# EAGLE board Qwiic_PIR-Panel (EAGLE 9.6.0), part 1 of 5
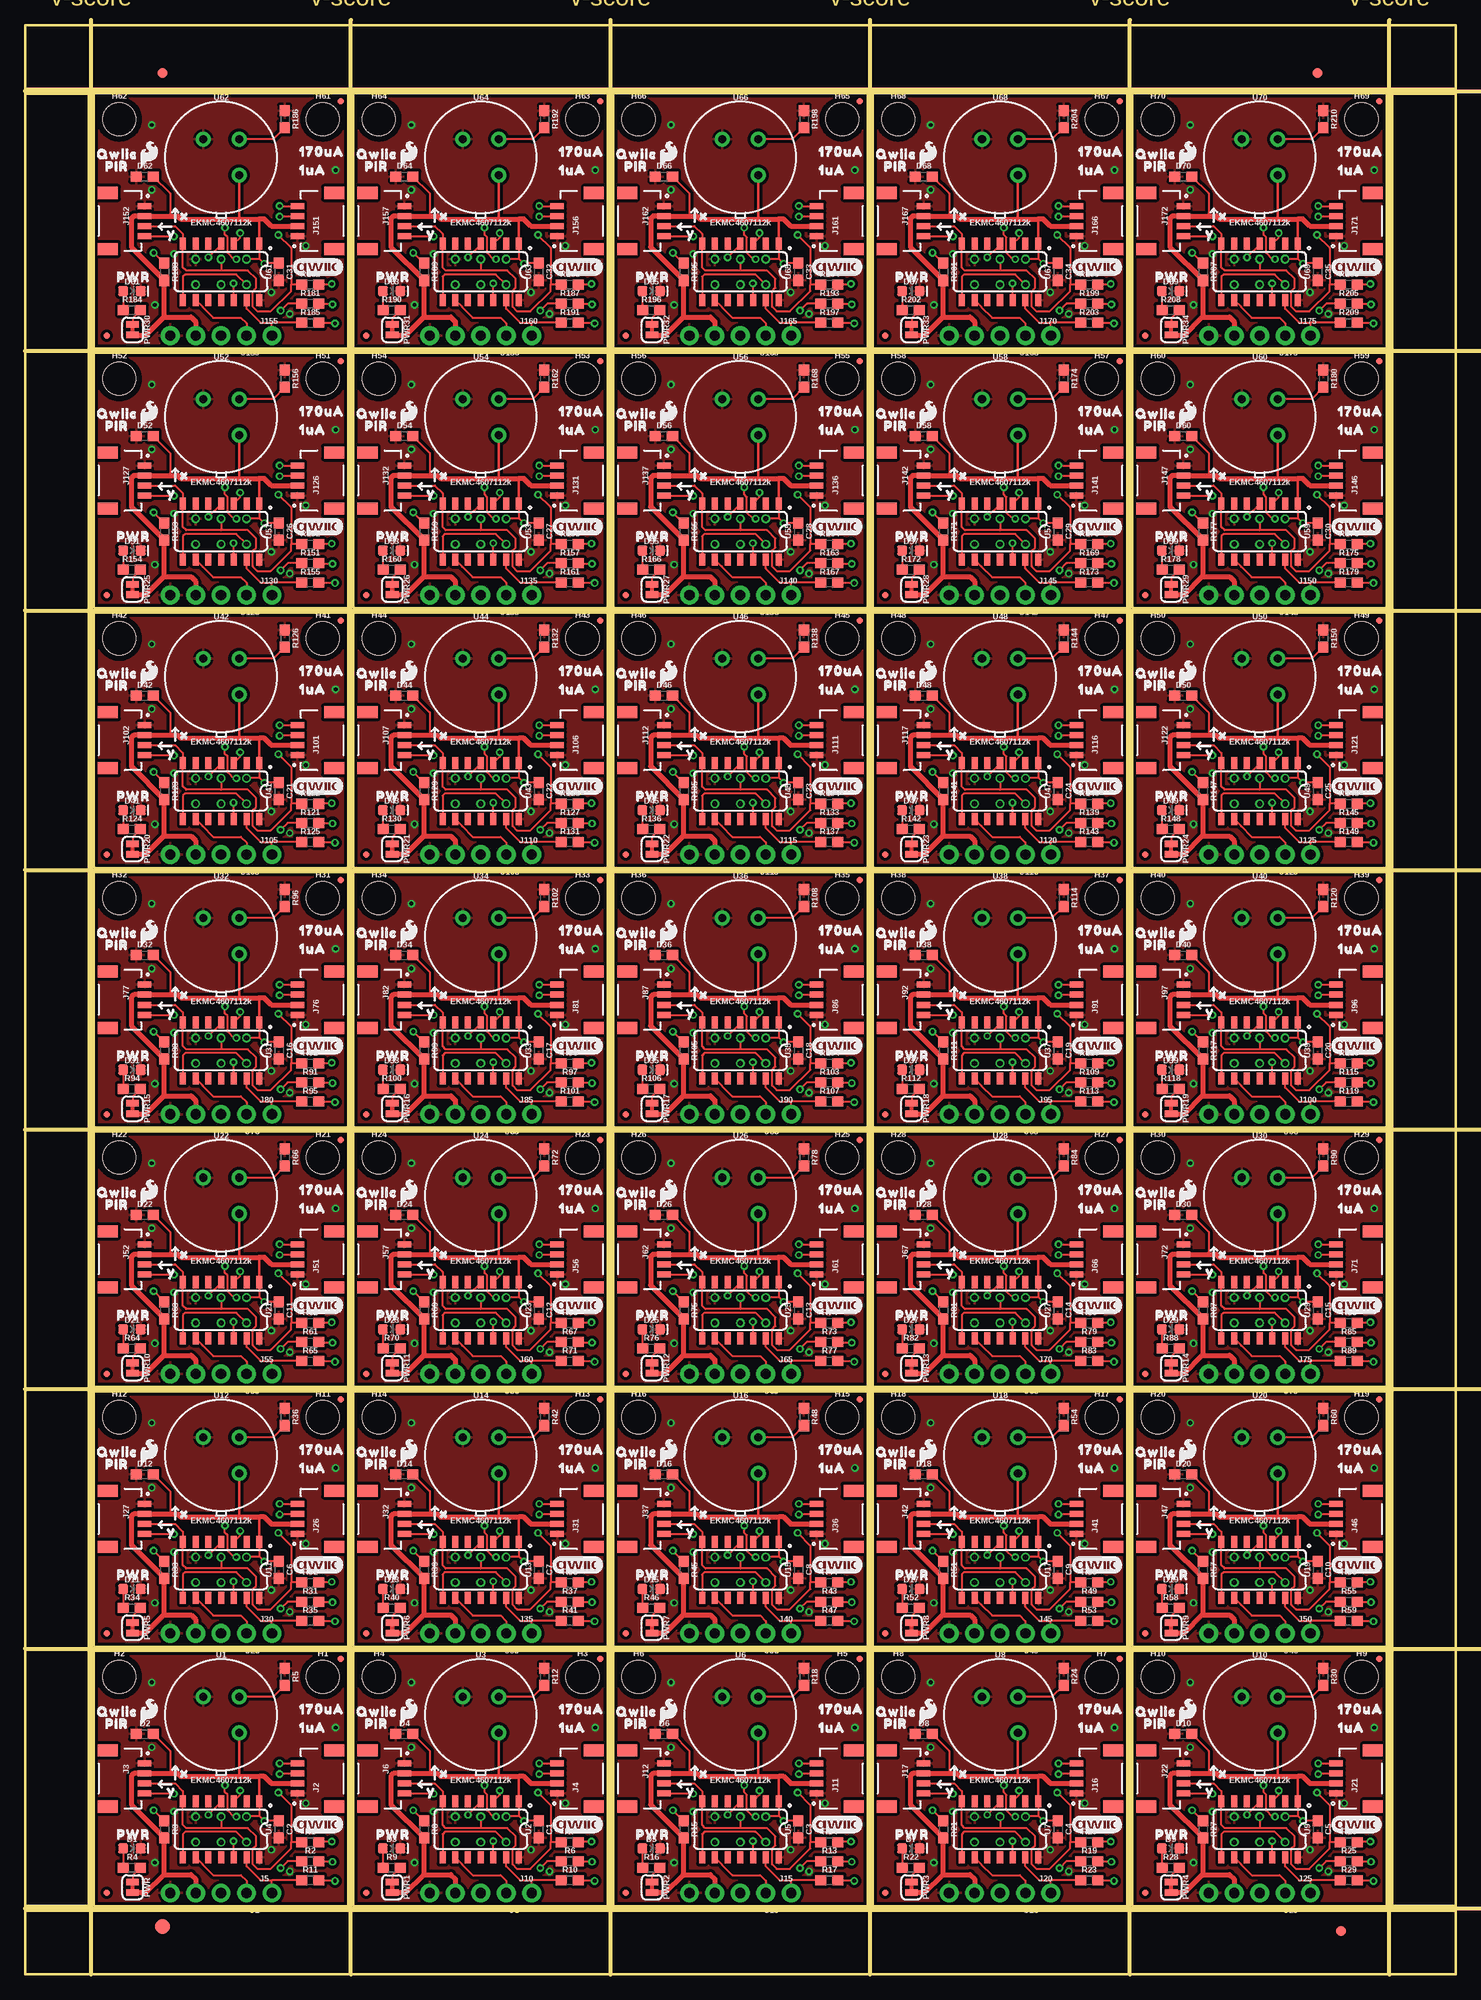
[diagram p0: board, top side]
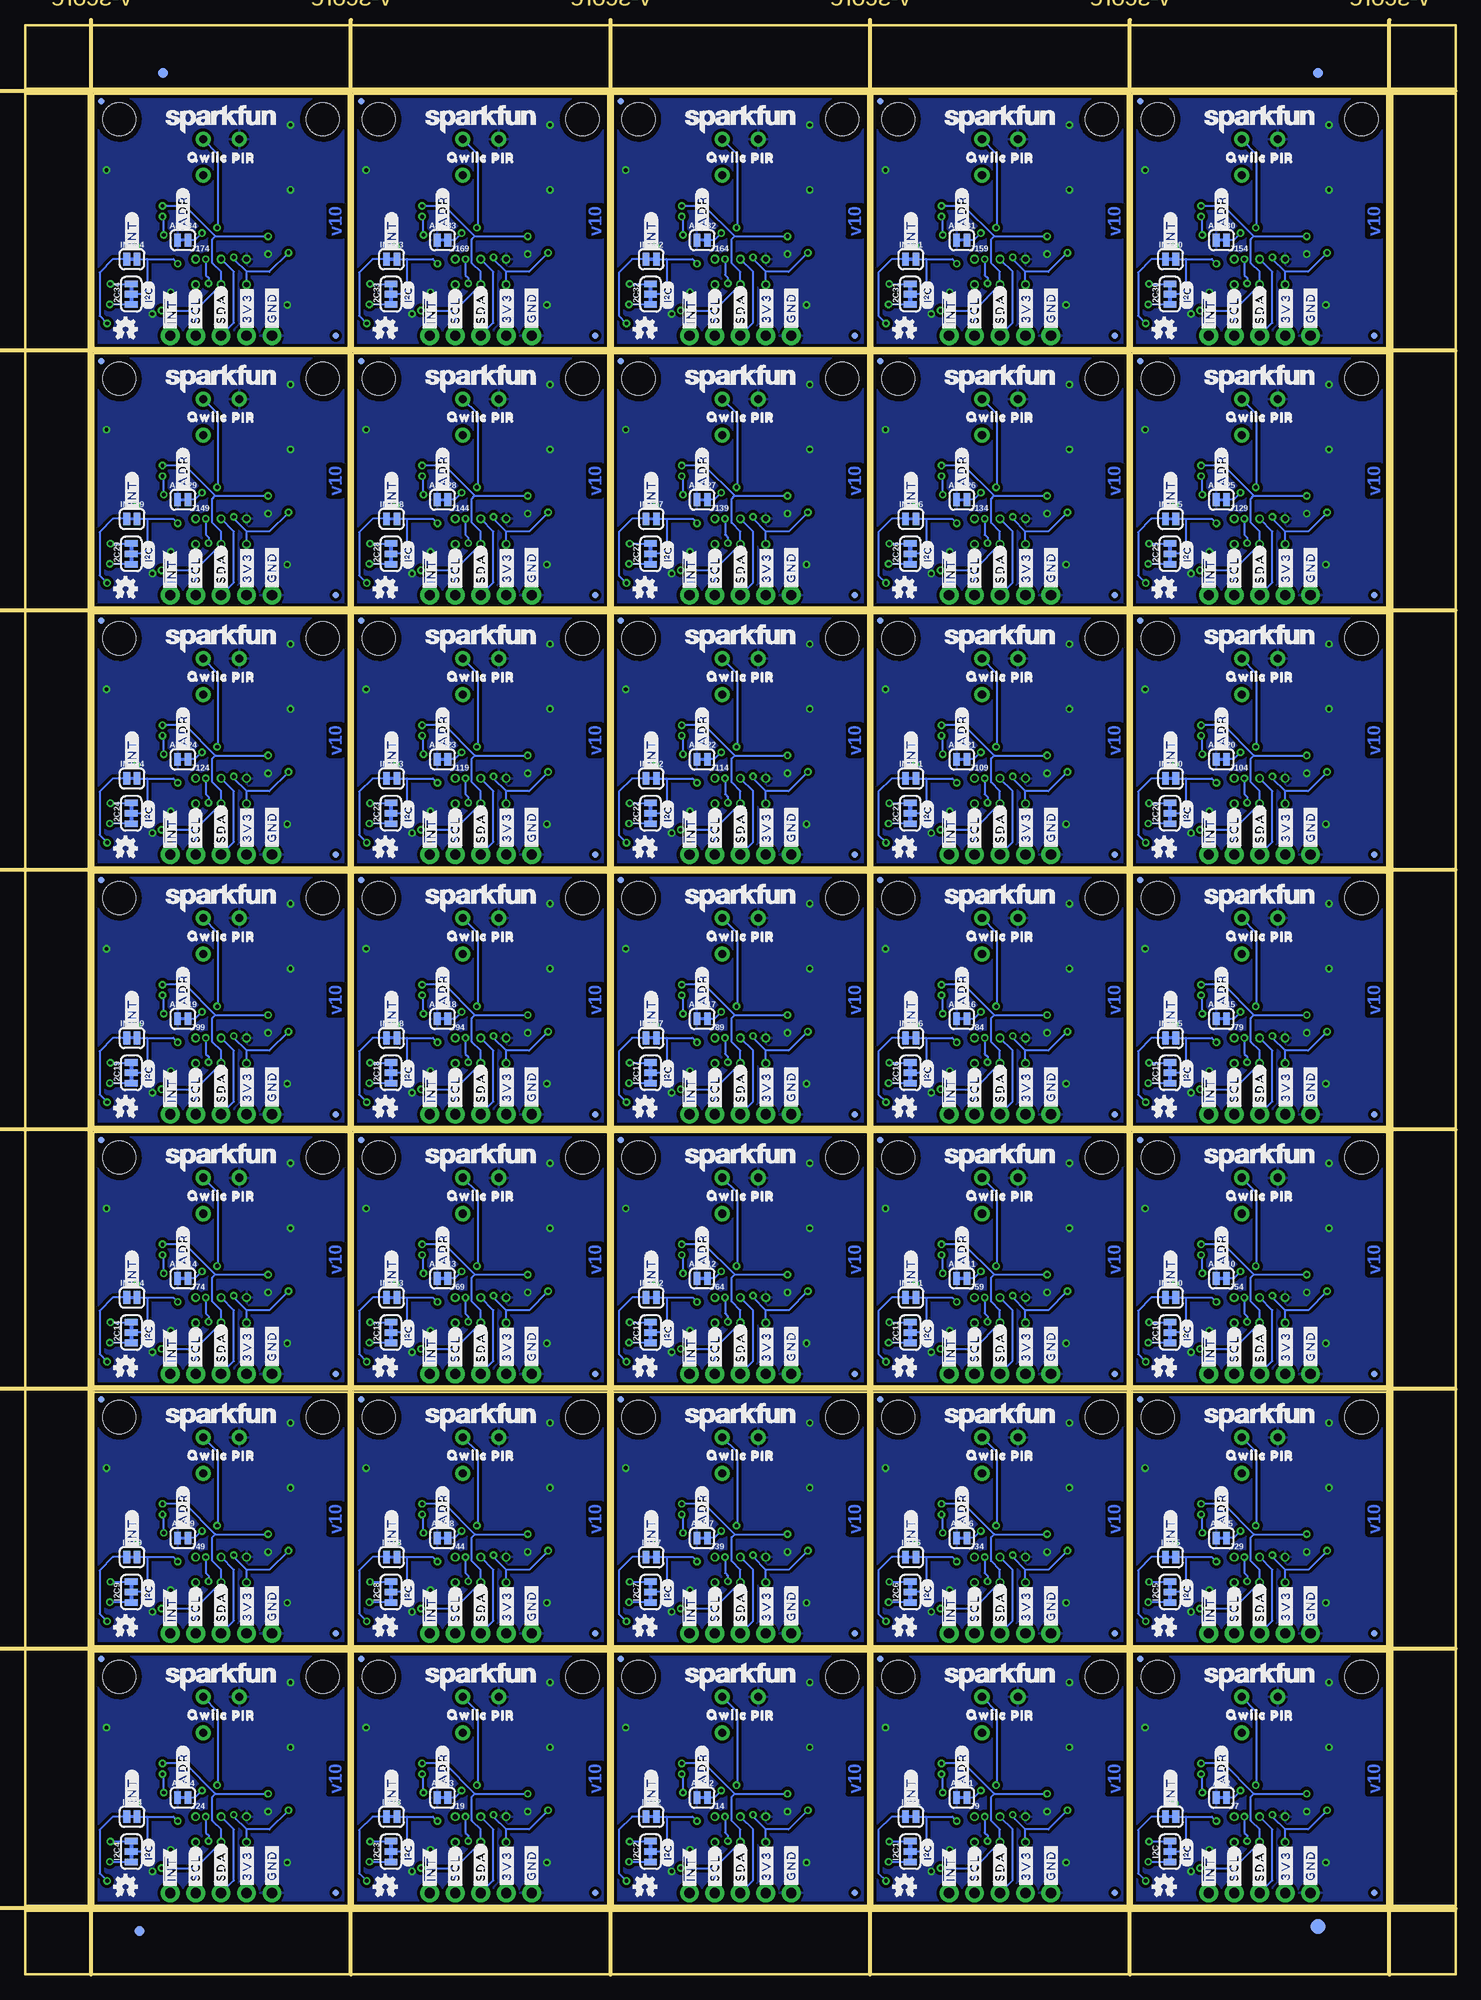
[diagram p1: board, bottom side, seen from below]

Size 142.75 x 194.56 mm. Coordinates in mm from the lower left corner, seen from the top.
Outline: 6.86,6.86 32.26,6.86 32.26,32.26 6.86,32.26 6.86,6.86
Outline: 32.77,6.86 58.17,6.86 58.17,32.26 32.77,32.26 32.77,6.86
Outline: 58.67,6.86 84.07,6.86 84.07,32.26 58.67,32.26 58.67,6.86
Outline: 84.58,6.86 109.98,6.86 109.98,32.26 84.58,32.26 84.58,6.86
Outline: 110.49,6.86 135.89,6.86 135.89,32.26 110.49,32.26 110.49,6.86
Outline: 6.86,32.77 32.26,32.77 32.26,58.17 6.86,58.17 6.86,32.77
Outline: 32.77,32.77 58.17,32.77 58.17,58.17 32.77,58.17 32.77,32.77
Outline: 58.67,32.77 84.07,32.77 84.07,58.17 58.67,58.17 58.67,32.77
Outline: 84.58,32.77 109.98,32.77 109.98,58.17 84.58,58.17 84.58,32.77
Outline: 110.49,32.77 135.89,32.77 135.89,58.17 110.49,58.17 110.49,32.77
Outline: 6.86,58.67 32.26,58.67 32.26,84.07 6.86,84.07 6.86,58.67
Outline: 32.77,58.67 58.17,58.67 58.17,84.07 32.77,84.07 32.77,58.67
Outline: 58.67,58.67 84.07,58.67 84.07,84.07 58.67,84.07 58.67,58.67
Outline: 84.58,58.67 109.98,58.67 109.98,84.07 84.58,84.07 84.58,58.67
Outline: 110.49,58.67 135.89,58.67 135.89,84.07 110.49,84.07 110.49,58.67
Outline: 6.86,84.58 32.26,84.58 32.26,109.98 6.86,109.98 6.86,84.58
Outline: 32.77,84.58 58.17,84.58 58.17,109.98 32.77,109.98 32.77,84.58
Outline: 58.67,84.58 84.07,84.58 84.07,109.98 58.67,109.98 58.67,84.58
Outline: 84.58,84.58 109.98,84.58 109.98,109.98 84.58,109.98 84.58,84.58
Outline: 110.49,84.58 135.89,84.58 135.89,109.98 110.49,109.98 110.49,84.58
Outline: 6.86,110.49 32.26,110.49 32.26,135.89 6.86,135.89 6.86,110.49
Outline: 32.77,110.49 58.17,110.49 58.17,135.89 32.77,135.89 32.77,110.49
Outline: 58.67,110.49 84.07,110.49 84.07,135.89 58.67,135.89 58.67,110.49
Outline: 84.58,110.49 109.98,110.49 109.98,135.89 84.58,135.89 84.58,110.49
Outline: 110.49,110.49 135.89,110.49 135.89,135.89 110.49,135.89 110.49,110.49
Outline: 6.86,136.4 32.26,136.4 32.26,161.8 6.86,161.8 6.86,136.4
Outline: 32.77,136.4 58.17,136.4 58.17,161.8 32.77,161.8 32.77,136.4
Outline: 58.67,136.4 84.07,136.4 84.07,161.8 58.67,161.8 58.67,136.4
Outline: 84.58,136.4 109.98,136.4 109.98,161.8 84.58,161.8 84.58,136.4
Outline: 110.49,136.4 135.89,136.4 135.89,161.8 110.49,161.8 110.49,136.4
Outline: 6.86,162.31 32.26,162.31 32.26,187.71 6.86,187.71 6.86,162.31
Outline: 32.77,162.31 58.17,162.31 58.17,187.71 32.77,187.71 32.77,162.31
Outline: 58.67,162.31 84.07,162.31 84.07,187.71 58.67,187.71 58.67,162.31
Outline: 84.58,162.31 109.98,162.31 109.98,187.71 84.58,187.71 84.58,162.31
Outline: 110.49,162.31 135.89,162.31 135.89,187.71 110.49,187.71 110.49,162.31
Outline: 0,6.35 142.75,6.35 142.75,0 0,0 0,6.35
Outline: 136.4,187.71 142.75,187.71 142.75,6.86 136.4,6.86 136.4,187.71
Outline: 0,194.56 142.75,194.56 142.75,188.21 0,188.21 0,194.56
Outline: 0,187.71 6.35,187.71 6.35,6.86 0,6.86 0,187.71
Copper layers (1*16): Top 0.035mm / dielectric 1.5mm / Bottom 0.035mm
Design rules "Qwiic_PIR": minimum track width 7mil, minimum drill 15mil, track to track 7mil, track to pad 7mil, pad to pad 7mil, via to via 7mil, smd to smd 7mil, copper to edge 7mil, drill to drill 7mil, minimum pad ring 7mil, minimum via ring 7mil, stop-mask expansion 4mil, vias tented up to drill 25mil, thermal gap 10mil
Milling: 14 lines

## Footprints (pad centres in the part's own frame; a part is rotated, then mirrored left to right if it is on the bottom)
SMT-JUMPER_2_NC_TRACE_SILK = smd 0.66 x 1.27: 1 -0.521,0; 2 0.521,0
0603 = smd 1.1 x 1: 1 -0.85,0; 2 0.85,0
LED-0603 = smd 1 x 1: A -0.877,0; C 0.877,0
FIDUCIAL-1X2 = smd 1 x 1: 1 0,0
FIDUCIAL-1.5X3 = smd 1.5 x 1.5: 1 0,0
STAND-OFF = hole 3.302: 0,0
SMT-JUMPER_3_2-NC_TRACE_SILK = smd 0.66 x 1.27: 1 -1.041,0; 2 0,0; 3 1.041,0
1X04_NO_SILK = drill 1.016 pad 1.88: 1 0,0; 2 2.54,0; 3 5.08,0; 4 7.62,0
JST04_1MM_RA = smd 0.6 x 1.35: 1 -1.5,0; 2 -0.5,0; 3 0.5,0; 4 1.5,0 | smd 1.2 x 2: NC1 2.8,-3.675; NC2 -2.8,-3.675
1X01_NO_SILK = drill 1.016 pad 1.88: 1 0,0
2X3_TEST_POINTS = drill 0.508: 1 -2.54,-1.27; 2 -2.54,1.27; 3 0,-1.27; 4 0,1.27; 5 2.54,-1.27; 6 2.54,1.27
MICRO-FIDUCIAL = smd 0.635 x 0.635: 1 0,0
TO-3 = drill 0.8 pad 1.5: GND -1.796,1.796; OUT 1.796,1.796; VDD 1.796,-1.796
SO14 = smd 0.6 x 1.2: 1 -3.81,-2.8; 2 -2.54,-2.8; 3 -1.27,-2.8; 4 0,-2.8; 5 1.27,-2.8; 6 2.54,-2.8; 7 3.81,-2.8; 8 3.81,2.8; 9 2.54,2.8; 10 1.27,2.8; 11 0,2.8; 12 -1.27,2.8; 13 -2.54,2.8; 14 -3.81,2.8

## Placement (x,y rotation side)
ADR  JUMPER-SMT_2_NC_TRACE_SILK  [SMT-JUMPER_2_NC_TRACE_SILK]  23.37,17.65 0 bottom
ADR1  JUMPER-SMT_2_NC_TRACE_SILK  [SMT-JUMPER_2_NC_TRACE_SILK]  49.28,17.65 0 bottom
ADR2  JUMPER-SMT_2_NC_TRACE_SILK  [SMT-JUMPER_2_NC_TRACE_SILK]  75.18,17.65 0 bottom
ADR3  JUMPER-SMT_2_NC_TRACE_SILK  [SMT-JUMPER_2_NC_TRACE_SILK]  101.09,17.65 0 bottom
ADR4  JUMPER-SMT_2_NC_TRACE_SILK  [SMT-JUMPER_2_NC_TRACE_SILK]  127,17.65 0 bottom
ADR5  JUMPER-SMT_2_NC_TRACE_SILK  [SMT-JUMPER_2_NC_TRACE_SILK]  23.37,43.56 0 bottom
ADR6  JUMPER-SMT_2_NC_TRACE_SILK  [SMT-JUMPER_2_NC_TRACE_SILK]  49.28,43.56 0 bottom
ADR7  JUMPER-SMT_2_NC_TRACE_SILK  [SMT-JUMPER_2_NC_TRACE_SILK]  75.18,43.56 0 bottom
ADR8  JUMPER-SMT_2_NC_TRACE_SILK  [SMT-JUMPER_2_NC_TRACE_SILK]  101.09,43.56 0 bottom
ADR9  JUMPER-SMT_2_NC_TRACE_SILK  [SMT-JUMPER_2_NC_TRACE_SILK]  127,43.56 0 bottom
ADR10  JUMPER-SMT_2_NC_TRACE_SILK  [SMT-JUMPER_2_NC_TRACE_SILK]  23.37,69.47 0 bottom
ADR11  JUMPER-SMT_2_NC_TRACE_SILK  [SMT-JUMPER_2_NC_TRACE_SILK]  49.28,69.47 0 bottom
ADR12  JUMPER-SMT_2_NC_TRACE_SILK  [SMT-JUMPER_2_NC_TRACE_SILK]  75.18,69.47 0 bottom
ADR13  JUMPER-SMT_2_NC_TRACE_SILK  [SMT-JUMPER_2_NC_TRACE_SILK]  101.09,69.47 0 bottom
ADR14  JUMPER-SMT_2_NC_TRACE_SILK  [SMT-JUMPER_2_NC_TRACE_SILK]  127,69.47 0 bottom
ADR15  JUMPER-SMT_2_NC_TRACE_SILK  [SMT-JUMPER_2_NC_TRACE_SILK]  23.37,95.38 0 bottom
ADR16  JUMPER-SMT_2_NC_TRACE_SILK  [SMT-JUMPER_2_NC_TRACE_SILK]  49.28,95.38 0 bottom
ADR17  JUMPER-SMT_2_NC_TRACE_SILK  [SMT-JUMPER_2_NC_TRACE_SILK]  75.18,95.38 0 bottom
ADR18  JUMPER-SMT_2_NC_TRACE_SILK  [SMT-JUMPER_2_NC_TRACE_SILK]  101.09,95.38 0 bottom
ADR19  JUMPER-SMT_2_NC_TRACE_SILK  [SMT-JUMPER_2_NC_TRACE_SILK]  127,95.38 0 bottom
ADR20  JUMPER-SMT_2_NC_TRACE_SILK  [SMT-JUMPER_2_NC_TRACE_SILK]  23.37,121.29 0 bottom
ADR21  JUMPER-SMT_2_NC_TRACE_SILK  [SMT-JUMPER_2_NC_TRACE_SILK]  49.28,121.29 0 bottom
ADR22  JUMPER-SMT_2_NC_TRACE_SILK  [SMT-JUMPER_2_NC_TRACE_SILK]  75.18,121.29 0 bottom
ADR23  JUMPER-SMT_2_NC_TRACE_SILK  [SMT-JUMPER_2_NC_TRACE_SILK]  101.09,121.29 0 bottom
ADR24  JUMPER-SMT_2_NC_TRACE_SILK  [SMT-JUMPER_2_NC_TRACE_SILK]  127,121.29 0 bottom
ADR25  JUMPER-SMT_2_NC_TRACE_SILK  [SMT-JUMPER_2_NC_TRACE_SILK]  23.37,147.19 0 bottom
ADR26  JUMPER-SMT_2_NC_TRACE_SILK  [SMT-JUMPER_2_NC_TRACE_SILK]  49.28,147.19 0 bottom
ADR27  JUMPER-SMT_2_NC_TRACE_SILK  [SMT-JUMPER_2_NC_TRACE_SILK]  75.18,147.19 0 bottom
ADR28  JUMPER-SMT_2_NC_TRACE_SILK  [SMT-JUMPER_2_NC_TRACE_SILK]  101.09,147.19 0 bottom
ADR29  JUMPER-SMT_2_NC_TRACE_SILK  [SMT-JUMPER_2_NC_TRACE_SILK]  127,147.19 0 bottom
ADR30  JUMPER-SMT_2_NC_TRACE_SILK  [SMT-JUMPER_2_NC_TRACE_SILK]  23.37,173.1 0 bottom
ADR31  JUMPER-SMT_2_NC_TRACE_SILK  [SMT-JUMPER_2_NC_TRACE_SILK]  49.28,173.1 0 bottom
ADR32  JUMPER-SMT_2_NC_TRACE_SILK  [SMT-JUMPER_2_NC_TRACE_SILK]  75.18,173.1 0 bottom
ADR33  JUMPER-SMT_2_NC_TRACE_SILK  [SMT-JUMPER_2_NC_TRACE_SILK]  101.09,173.1 0 bottom
ADR34  JUMPER-SMT_2_NC_TRACE_SILK  [SMT-JUMPER_2_NC_TRACE_SILK]  127,173.1 0 bottom
C1  0.1uF  [0603]  51.24,14.48 270 top
C2  0.1uF  [0603]  25.34,14.48 270 top
C3  0.1uF  [0603]  77.15,14.48 270 top
C4  0.1uF  [0603]  103.06,14.48 270 top
C5  0.1uF  [0603]  128.97,14.48 270 top
C6  0.1uF  [0603]  25.34,40.39 270 top
C7  0.1uF  [0603]  51.24,40.39 270 top
C8  0.1uF  [0603]  77.15,40.39 270 top
C9  0.1uF  [0603]  103.06,40.39 270 top
C10  0.1uF  [0603]  128.97,40.39 270 top
C11  0.1uF  [0603]  25.34,66.29 270 top
C12  0.1uF  [0603]  51.24,66.29 270 top
C13  0.1uF  [0603]  77.15,66.29 270 top
C14  0.1uF  [0603]  103.06,66.29 270 top
C15  0.1uF  [0603]  128.97,66.29 270 top
C16  0.1uF  [0603]  25.34,92.2 270 top
C17  0.1uF  [0603]  51.24,92.2 270 top
C18  0.1uF  [0603]  77.15,92.2 270 top
C19  0.1uF  [0603]  103.06,92.2 270 top
C20  0.1uF  [0603]  128.97,92.2 270 top
C21  0.1uF  [0603]  25.34,118.11 270 top
C22  0.1uF  [0603]  51.24,118.11 270 top
C23  0.1uF  [0603]  77.15,118.11 270 top
C24  0.1uF  [0603]  103.06,118.11 270 top
C25  0.1uF  [0603]  128.97,118.11 270 top
C26  0.1uF  [0603]  25.34,144.02 270 top
C27  0.1uF  [0603]  51.24,144.02 270 top
C28  0.1uF  [0603]  77.15,144.02 270 top
C29  0.1uF  [0603]  103.06,144.02 270 top
C30  0.1uF  [0603]  128.97,144.02 270 top
C31  0.1uF  [0603]  25.34,169.93 270 top
C32  0.1uF  [0603]  51.24,169.93 270 top
C33  0.1uF  [0603]  77.15,169.93 270 top
C34  0.1uF  [0603]  103.06,169.93 270 top
C35  0.1uF  [0603]  128.97,169.93 270 top
D1  RED  [LED-0603]  10.67,12.57 0 top
D2  24V  [0603]  11.94,24 0 top
D3  RED  [LED-0603]  36.58,12.57 0 top
D4  24V  [0603]  37.85,24 0 top
D5  RED  [LED-0603]  62.48,12.57 0 top
D6  24V  [0603]  63.75,24 0 top
D7  RED  [LED-0603]  88.39,12.57 0 top
D8  24V  [0603]  89.66,24 0 top
D9  RED  [LED-0603]  114.3,12.57 0 top
D10  24V  [0603]  115.57,24 0 top
D11  RED  [LED-0603]  10.67,38.48 0 top
D12  24V  [0603]  11.94,49.91 0 top
D13  RED  [LED-0603]  36.58,38.48 0 top
D14  24V  [0603]  37.85,49.91 0 top
D15  RED  [LED-0603]  62.48,38.48 0 top
D16  24V  [0603]  63.75,49.91 0 top
D17  RED  [LED-0603]  88.39,38.48 0 top
D18  24V  [0603]  89.66,49.91 0 top
D19  RED  [LED-0603]  114.3,38.48 0 top
D20  24V  [0603]  115.57,49.91 0 top
D21  RED  [LED-0603]  10.67,64.39 0 top
D22  24V  [0603]  11.94,75.82 0 top
D23  RED  [LED-0603]  36.58,64.39 0 top
D24  24V  [0603]  37.85,75.82 0 top
D25  RED  [LED-0603]  62.48,64.39 0 top
D26  24V  [0603]  63.75,75.82 0 top
D27  RED  [LED-0603]  88.39,64.39 0 top
D28  24V  [0603]  89.66,75.82 0 top
D29  RED  [LED-0603]  114.3,64.39 0 top
D30  24V  [0603]  115.57,75.82 0 top
D31  RED  [LED-0603]  10.67,90.3 0 top
D32  24V  [0603]  11.94,101.73 0 top
D33  RED  [LED-0603]  36.58,90.3 0 top
D34  24V  [0603]  37.85,101.73 0 top
D35  RED  [LED-0603]  62.48,90.3 0 top
D36  24V  [0603]  63.75,101.73 0 top
D37  RED  [LED-0603]  88.39,90.3 0 top
D38  24V  [0603]  89.66,101.73 0 top
D39  RED  [LED-0603]  114.3,90.3 0 top
D40  24V  [0603]  115.57,101.73 0 top
D41  RED  [LED-0603]  10.67,116.2 0 top
D42  24V  [0603]  11.94,127.64 0 top
D43  RED  [LED-0603]  36.58,116.2 0 top
D44  24V  [0603]  37.85,127.64 0 top
D45  RED  [LED-0603]  62.48,116.2 0 top
D46  24V  [0603]  63.75,127.64 0 top
D47  RED  [LED-0603]  88.39,116.2 0 top
D48  24V  [0603]  89.66,127.64 0 top
D49  RED  [LED-0603]  114.3,116.2 0 top
D50  24V  [0603]  115.57,127.64 0 top
D51  RED  [LED-0603]  10.67,142.11 0 top
D52  24V  [0603]  11.94,153.54 0 top
D53  RED  [LED-0603]  36.58,142.11 0 top
D54  24V  [0603]  37.85,153.54 0 top
D55  RED  [LED-0603]  62.48,142.11 0 top
D56  24V  [0603]  63.75,153.54 0 top
D57  RED  [LED-0603]  88.39,142.11 0 top
D58  24V  [0603]  89.66,153.54 0 top
D59  RED  [LED-0603]  114.3,142.11 0 top
D60  24V  [0603]  115.57,153.54 0 top
D61  RED  [LED-0603]  10.67,168.02 0 top
D62  24V  [0603]  11.94,179.45 0 top
D63  RED  [LED-0603]  36.58,168.02 0 top
D64  24V  [0603]  37.85,179.45 0 top
D65  RED  [LED-0603]  62.48,168.02 0 top
D66  24V  [0603]  63.75,179.45 0 top
D67  RED  [LED-0603]  88.39,168.02 0 top
D68  24V  [0603]  89.66,179.45 0 top
D69  RED  [LED-0603]  114.3,168.02 0 top
D70  24V  [0603]  115.57,179.45 0 top
E$1  [FIDUCIAL-1X2]  13.72,189.8 0 top
E$2  [FIDUCIAL-1X2]  13.72,189.8 0 bottom
E$3  [FIDUCIAL-1X2]  128.97,189.8 0 top
E$4  [FIDUCIAL-1X2]  128.97,189.8 0 bottom
E$5  [FIDUCIAL-1.5X3]  13.72,4.76 0 top
E$6  [FIDUCIAL-1.5X3]  13.72,4.76 0 bottom
E$7  [FIDUCIAL-1X2]  131.32,4.32 0 bottom
E$8  [FIDUCIAL-1X2]  131.32,4.32 0 top
H1  STAND-OFF  [STAND-OFF]  29.72,29.72 0 top
H2  STAND-OFF  [STAND-OFF]  9.4,29.72 0 top
H3  STAND-OFF  [STAND-OFF]  55.63,29.72 0 top
H4  STAND-OFF  [STAND-OFF]  35.31,29.72 0 top
H5  STAND-OFF  [STAND-OFF]  81.53,29.72 0 top
H6  STAND-OFF  [STAND-OFF]  61.21,29.72 0 top
H7  STAND-OFF  [STAND-OFF]  107.44,29.72 0 top
H8  STAND-OFF  [STAND-OFF]  87.12,29.72 0 top
H9  STAND-OFF  [STAND-OFF]  133.35,29.72 0 top
H10  STAND-OFF  [STAND-OFF]  113.03,29.72 0 top
H11  STAND-OFF  [STAND-OFF]  29.72,55.63 0 top
H12  STAND-OFF  [STAND-OFF]  9.4,55.63 0 top
H13  STAND-OFF  [STAND-OFF]  55.63,55.63 0 top
H14  STAND-OFF  [STAND-OFF]  35.31,55.63 0 top
H15  STAND-OFF  [STAND-OFF]  81.53,55.63 0 top
H16  STAND-OFF  [STAND-OFF]  61.21,55.63 0 top
H17  STAND-OFF  [STAND-OFF]  107.44,55.63 0 top
H18  STAND-OFF  [STAND-OFF]  87.12,55.63 0 top
H19  STAND-OFF  [STAND-OFF]  133.35,55.63 0 top
H20  STAND-OFF  [STAND-OFF]  113.03,55.63 0 top
H21  STAND-OFF  [STAND-OFF]  29.72,81.53 0 top
H22  STAND-OFF  [STAND-OFF]  9.4,81.53 0 top
H23  STAND-OFF  [STAND-OFF]  55.63,81.53 0 top
H24  STAND-OFF  [STAND-OFF]  35.31,81.53 0 top
H25  STAND-OFF  [STAND-OFF]  81.53,81.53 0 top
H26  STAND-OFF  [STAND-OFF]  61.21,81.53 0 top
H27  STAND-OFF  [STAND-OFF]  107.44,81.53 0 top
H28  STAND-OFF  [STAND-OFF]  87.12,81.53 0 top
H29  STAND-OFF  [STAND-OFF]  133.35,81.53 0 top
H30  STAND-OFF  [STAND-OFF]  113.03,81.53 0 top
H31  STAND-OFF  [STAND-OFF]  29.72,107.44 0 top
H32  STAND-OFF  [STAND-OFF]  9.4,107.44 0 top
H33  STAND-OFF  [STAND-OFF]  55.63,107.44 0 top
H34  STAND-OFF  [STAND-OFF]  35.31,107.44 0 top
H35  STAND-OFF  [STAND-OFF]  81.53,107.44 0 top
H36  STAND-OFF  [STAND-OFF]  61.21,107.44 0 top
H37  STAND-OFF  [STAND-OFF]  107.44,107.44 0 top
H38  STAND-OFF  [STAND-OFF]  87.12,107.44 0 top
H39  STAND-OFF  [STAND-OFF]  133.35,107.44 0 top
H40  STAND-OFF  [STAND-OFF]  113.03,107.44 0 top
H41  STAND-OFF  [STAND-OFF]  29.72,133.35 0 top
H42  STAND-OFF  [STAND-OFF]  9.4,133.35 0 top
H43  STAND-OFF  [STAND-OFF]  55.63,133.35 0 top
H44  STAND-OFF  [STAND-OFF]  35.31,133.35 0 top
H45  STAND-OFF  [STAND-OFF]  81.53,133.35 0 top
H46  STAND-OFF  [STAND-OFF]  61.21,133.35 0 top
H47  STAND-OFF  [STAND-OFF]  107.44,133.35 0 top
H48  STAND-OFF  [STAND-OFF]  87.12,133.35 0 top
H49  STAND-OFF  [STAND-OFF]  133.35,133.35 0 top
H50  STAND-OFF  [STAND-OFF]  113.03,133.35 0 top
H51  STAND-OFF  [STAND-OFF]  29.72,159.26 0 top
H52  STAND-OFF  [STAND-OFF]  9.4,159.26 0 top
H53  STAND-OFF  [STAND-OFF]  55.63,159.26 0 top
H54  STAND-OFF  [STAND-OFF]  35.31,159.26 0 top
H55  STAND-OFF  [STAND-OFF]  81.53,159.26 0 top
H56  STAND-OFF  [STAND-OFF]  61.21,159.26 0 top
H57  STAND-OFF  [STAND-OFF]  107.44,159.26 0 top
H58  STAND-OFF  [STAND-OFF]  87.12,159.26 0 top
H59  STAND-OFF  [STAND-OFF]  133.35,159.26 0 top
H60  STAND-OFF  [STAND-OFF]  113.03,159.26 0 top
H61  STAND-OFF  [STAND-OFF]  29.72,185.17 0 top
H62  STAND-OFF  [STAND-OFF]  9.4,185.17 0 top
H63  STAND-OFF  [STAND-OFF]  55.63,185.17 0 top
H64  STAND-OFF  [STAND-OFF]  35.31,185.17 0 top
H65  STAND-OFF  [STAND-OFF]  81.53,185.17 0 top
H66  STAND-OFF  [STAND-OFF]  61.21,185.17 0 top
H67  STAND-OFF  [STAND-OFF]  107.44,185.17 0 top
H68  STAND-OFF  [STAND-OFF]  87.12,185.17 0 top
H69  STAND-OFF  [STAND-OFF]  133.35,185.17 0 top
H70  STAND-OFF  [STAND-OFF]  113.03,185.17 0 top
I2C  JUMPER-SMT_3_2-NC_TRACE_SILK  [SMT-JUMPER_3_2-NC_TRACE_SILK]  28.51,12.26 90 bottom
I2C1  JUMPER-SMT_3_2-NC_TRACE_SILK  [SMT-JUMPER_3_2-NC_TRACE_SILK]  54.42,12.26 90 bottom
I2C2  JUMPER-SMT_3_2-NC_TRACE_SILK  [SMT-JUMPER_3_2-NC_TRACE_SILK]  80.33,12.26 90 bottom
I2C3  JUMPER-SMT_3_2-NC_TRACE_SILK  [SMT-JUMPER_3_2-NC_TRACE_SILK]  106.24,12.26 90 bottom
I2C4  JUMPER-SMT_3_2-NC_TRACE_SILK  [SMT-JUMPER_3_2-NC_TRACE_SILK]  132.14,12.26 90 bottom
I2C5  JUMPER-SMT_3_2-NC_TRACE_SILK  [SMT-JUMPER_3_2-NC_TRACE_SILK]  28.51,38.16 90 bottom
I2C6  JUMPER-SMT_3_2-NC_TRACE_SILK  [SMT-JUMPER_3_2-NC_TRACE_SILK]  54.42,38.16 90 bottom
I2C7  JUMPER-SMT_3_2-NC_TRACE_SILK  [SMT-JUMPER_3_2-NC_TRACE_SILK]  80.33,38.16 90 bottom
I2C8  JUMPER-SMT_3_2-NC_TRACE_SILK  [SMT-JUMPER_3_2-NC_TRACE_SILK]  106.24,38.16 90 bottom
I2C9  JUMPER-SMT_3_2-NC_TRACE_SILK  [SMT-JUMPER_3_2-NC_TRACE_SILK]  132.14,38.16 90 bottom
I2C10  JUMPER-SMT_3_2-NC_TRACE_SILK  [SMT-JUMPER_3_2-NC_TRACE_SILK]  28.51,64.07 90 bottom
I2C11  JUMPER-SMT_3_2-NC_TRACE_SILK  [SMT-JUMPER_3_2-NC_TRACE_SILK]  54.42,64.07 90 bottom
I2C12  JUMPER-SMT_3_2-NC_TRACE_SILK  [SMT-JUMPER_3_2-NC_TRACE_SILK]  80.33,64.07 90 bottom
I2C13  JUMPER-SMT_3_2-NC_TRACE_SILK  [SMT-JUMPER_3_2-NC_TRACE_SILK]  106.24,64.07 90 bottom
I2C14  JUMPER-SMT_3_2-NC_TRACE_SILK  [SMT-JUMPER_3_2-NC_TRACE_SILK]  132.14,64.07 90 bottom
I2C15  JUMPER-SMT_3_2-NC_TRACE_SILK  [SMT-JUMPER_3_2-NC_TRACE_SILK]  28.51,89.98 90 bottom
I2C16  JUMPER-SMT_3_2-NC_TRACE_SILK  [SMT-JUMPER_3_2-NC_TRACE_SILK]  54.42,89.98 90 bottom
I2C17  JUMPER-SMT_3_2-NC_TRACE_SILK  [SMT-JUMPER_3_2-NC_TRACE_SILK]  80.33,89.98 90 bottom
I2C18  JUMPER-SMT_3_2-NC_TRACE_SILK  [SMT-JUMPER_3_2-NC_TRACE_SILK]  106.24,89.98 90 bottom
I2C19  JUMPER-SMT_3_2-NC_TRACE_SILK  [SMT-JUMPER_3_2-NC_TRACE_SILK]  132.14,89.98 90 bottom
I2C20  JUMPER-SMT_3_2-NC_TRACE_SILK  [SMT-JUMPER_3_2-NC_TRACE_SILK]  28.51,115.89 90 bottom
I2C21  JUMPER-SMT_3_2-NC_TRACE_SILK  [SMT-JUMPER_3_2-NC_TRACE_SILK]  54.42,115.89 90 bottom
I2C22  JUMPER-SMT_3_2-NC_TRACE_SILK  [SMT-JUMPER_3_2-NC_TRACE_SILK]  80.33,115.89 90 bottom
I2C23  JUMPER-SMT_3_2-NC_TRACE_SILK  [SMT-JUMPER_3_2-NC_TRACE_SILK]  106.24,115.89 90 bottom
I2C24  JUMPER-SMT_3_2-NC_TRACE_SILK  [SMT-JUMPER_3_2-NC_TRACE_SILK]  132.14,115.89 90 bottom
I2C25  JUMPER-SMT_3_2-NC_TRACE_SILK  [SMT-JUMPER_3_2-NC_TRACE_SILK]  28.51,141.8 90 bottom
I2C26  JUMPER-SMT_3_2-NC_TRACE_SILK  [SMT-JUMPER_3_2-NC_TRACE_SILK]  54.42,141.8 90 bottom
I2C27  JUMPER-SMT_3_2-NC_TRACE_SILK  [SMT-JUMPER_3_2-NC_TRACE_SILK]  80.33,141.8 90 bottom
I2C28  JUMPER-SMT_3_2-NC_TRACE_SILK  [SMT-JUMPER_3_2-NC_TRACE_SILK]  106.24,141.8 90 bottom
I2C29  JUMPER-SMT_3_2-NC_TRACE_SILK  [SMT-JUMPER_3_2-NC_TRACE_SILK]  132.14,141.8 90 bottom
I2C30  JUMPER-SMT_3_2-NC_TRACE_SILK  [SMT-JUMPER_3_2-NC_TRACE_SILK]  28.51,167.7 90 bottom
I2C31  JUMPER-SMT_3_2-NC_TRACE_SILK  [SMT-JUMPER_3_2-NC_TRACE_SILK]  54.42,167.7 90 bottom
I2C32  JUMPER-SMT_3_2-NC_TRACE_SILK  [SMT-JUMPER_3_2-NC_TRACE_SILK]  80.33,167.7 90 bottom
I2C33  JUMPER-SMT_3_2-NC_TRACE_SILK  [SMT-JUMPER_3_2-NC_TRACE_SILK]  106.24,167.7 90 bottom
I2C34  JUMPER-SMT_3_2-NC_TRACE_SILK  [SMT-JUMPER_3_2-NC_TRACE_SILK]  132.14,167.7 90 bottom
INT  JUMPER-SMT_2_NC_TRACE_SILK  [SMT-JUMPER_2_NC_TRACE_SILK]  28.45,15.75 0 bottom
INT1  JUMPER-SMT_2_NC_TRACE_SILK  [SMT-JUMPER_2_NC_TRACE_SILK]  54.36,15.75 0 bottom
INT2  JUMPER-SMT_2_NC_TRACE_SILK  [SMT-JUMPER_2_NC_TRACE_SILK]  80.26,15.75 0 bottom
INT3  JUMPER-SMT_2_NC_TRACE_SILK  [SMT-JUMPER_2_NC_TRACE_SILK]  106.17,15.75 0 bottom
INT4  JUMPER-SMT_2_NC_TRACE_SILK  [SMT-JUMPER_2_NC_TRACE_SILK]  132.08,15.75 0 bottom
INT5  JUMPER-SMT_2_NC_TRACE_SILK  [SMT-JUMPER_2_NC_TRACE_SILK]  28.45,41.66 0 bottom
INT6  JUMPER-SMT_2_NC_TRACE_SILK  [SMT-JUMPER_2_NC_TRACE_SILK]  54.36,41.66 0 bottom
INT7  JUMPER-SMT_2_NC_TRACE_SILK  [SMT-JUMPER_2_NC_TRACE_SILK]  80.26,41.66 0 bottom
INT8  JUMPER-SMT_2_NC_TRACE_SILK  [SMT-JUMPER_2_NC_TRACE_SILK]  106.17,41.66 0 bottom
INT9  JUMPER-SMT_2_NC_TRACE_SILK  [SMT-JUMPER_2_NC_TRACE_SILK]  132.08,41.66 0 bottom
INT10  JUMPER-SMT_2_NC_TRACE_SILK  [SMT-JUMPER_2_NC_TRACE_SILK]  28.45,67.56 0 bottom
INT11  JUMPER-SMT_2_NC_TRACE_SILK  [SMT-JUMPER_2_NC_TRACE_SILK]  54.36,67.56 0 bottom
INT12  JUMPER-SMT_2_NC_TRACE_SILK  [SMT-JUMPER_2_NC_TRACE_SILK]  80.26,67.56 0 bottom
INT13  JUMPER-SMT_2_NC_TRACE_SILK  [SMT-JUMPER_2_NC_TRACE_SILK]  106.17,67.56 0 bottom
INT14  JUMPER-SMT_2_NC_TRACE_SILK  [SMT-JUMPER_2_NC_TRACE_SILK]  132.08,67.56 0 bottom
INT15  JUMPER-SMT_2_NC_TRACE_SILK  [SMT-JUMPER_2_NC_TRACE_SILK]  28.45,93.47 0 bottom
INT16  JUMPER-SMT_2_NC_TRACE_SILK  [SMT-JUMPER_2_NC_TRACE_SILK]  54.36,93.47 0 bottom
INT17  JUMPER-SMT_2_NC_TRACE_SILK  [SMT-JUMPER_2_NC_TRACE_SILK]  80.26,93.47 0 bottom
INT18  JUMPER-SMT_2_NC_TRACE_SILK  [SMT-JUMPER_2_NC_TRACE_SILK]  106.17,93.47 0 bottom
INT19  JUMPER-SMT_2_NC_TRACE_SILK  [SMT-JUMPER_2_NC_TRACE_SILK]  132.08,93.47 0 bottom
INT20  JUMPER-SMT_2_NC_TRACE_SILK  [SMT-JUMPER_2_NC_TRACE_SILK]  28.45,119.38 0 bottom
INT21  JUMPER-SMT_2_NC_TRACE_SILK  [SMT-JUMPER_2_NC_TRACE_SILK]  54.36,119.38 0 bottom
INT22  JUMPER-SMT_2_NC_TRACE_SILK  [SMT-JUMPER_2_NC_TRACE_SILK]  80.26,119.38 0 bottom
INT23  JUMPER-SMT_2_NC_TRACE_SILK  [SMT-JUMPER_2_NC_TRACE_SILK]  106.17,119.38 0 bottom
INT24  JUMPER-SMT_2_NC_TRACE_SILK  [SMT-JUMPER_2_NC_TRACE_SILK]  132.08,119.38 0 bottom
INT25  JUMPER-SMT_2_NC_TRACE_SILK  [SMT-JUMPER_2_NC_TRACE_SILK]  28.45,145.29 0 bottom
INT26  JUMPER-SMT_2_NC_TRACE_SILK  [SMT-JUMPER_2_NC_TRACE_SILK]  54.36,145.29 0 bottom
INT27  JUMPER-SMT_2_NC_TRACE_SILK  [SMT-JUMPER_2_NC_TRACE_SILK]  80.26,145.29 0 bottom
INT28  JUMPER-SMT_2_NC_TRACE_SILK  [SMT-JUMPER_2_NC_TRACE_SILK]  106.17,145.29 0 bottom
INT29  JUMPER-SMT_2_NC_TRACE_SILK  [SMT-JUMPER_2_NC_TRACE_SILK]  132.08,145.29 0 bottom
INT30  JUMPER-SMT_2_NC_TRACE_SILK  [SMT-JUMPER_2_NC_TRACE_SILK]  28.45,171.2 0 bottom
INT31  JUMPER-SMT_2_NC_TRACE_SILK  [SMT-JUMPER_2_NC_TRACE_SILK]  54.36,171.2 0 bottom
INT32  JUMPER-SMT_2_NC_TRACE_SILK  [SMT-JUMPER_2_NC_TRACE_SILK]  80.26,171.2 0 bottom
INT33  JUMPER-SMT_2_NC_TRACE_SILK  [SMT-JUMPER_2_NC_TRACE_SILK]  106.17,171.2 0 bottom
INT34  JUMPER-SMT_2_NC_TRACE_SILK  [SMT-JUMPER_2_NC_TRACE_SILK]  132.08,171.2 0 bottom
J1  [1X04_NO_SILK]  22.1,8.13 180 top
J2  QWIIC  [JST04_1MM_RA]  27.18,19.56 90 top
J3  QWIIC  [JST04_1MM_RA]  11.94,19.56 270 top
J4  QWIIC  [JST04_1MM_RA]  53.09,19.56 90 top
J5  [1X01_NO_SILK]  24.64,8.13 0 top
J6  QWIIC  [JST04_1MM_RA]  37.85,19.56 270 top
J7  ISP  [2X3_TEST_POINTS]  19.56,14.48 0 bottom
J8  [1X04_NO_SILK]  48.01,8.13 180 top
J9  ISP  [2X3_TEST_POINTS]  45.47,14.48 0 bottom
J10  [1X01_NO_SILK]  50.55,8.13 0 top
J11  QWIIC  [JST04_1MM_RA]  78.99,19.56 90 top
J12  QWIIC  [JST04_1MM_RA]  63.75,19.56 270 top
J13  [1X04_NO_SILK]  73.91,8.13 180 top
J14  ISP  [2X3_TEST_POINTS]  71.37,14.48 0 bottom
J15  [1X01_NO_SILK]  76.45,8.13 0 top
J16  QWIIC  [JST04_1MM_RA]  104.9,19.56 90 top
J17  QWIIC  [JST04_1MM_RA]  89.66,19.56 270 top
J18  [1X04_NO_SILK]  99.82,8.13 180 top
J19  ISP  [2X3_TEST_POINTS]  97.28,14.48 0 bottom
J20  [1X01_NO_SILK]  102.36,8.13 0 top
J21  QWIIC  [JST04_1MM_RA]  130.81,19.56 90 top
J22  QWIIC  [JST04_1MM_RA]  115.57,19.56 270 top
J23  [1X04_NO_SILK]  125.73,8.13 180 top
J24  ISP  [2X3_TEST_POINTS]  123.19,14.48 0 bottom
J25  [1X01_NO_SILK]  128.27,8.13 0 top
J26  QWIIC  [JST04_1MM_RA]  27.18,45.47 90 top
J27  QWIIC  [JST04_1MM_RA]  11.94,45.47 270 top
J28  [1X04_NO_SILK]  22.1,34.04 180 top
J29  ISP  [2X3_TEST_POINTS]  19.56,40.39 0 bottom
J30  [1X01_NO_SILK]  24.64,34.04 0 top
J31  QWIIC  [JST04_1MM_RA]  53.09,45.47 90 top
J32  QWIIC  [JST04_1MM_RA]  37.85,45.47 270 top
J33  [1X04_NO_SILK]  48.01,34.04 180 top
J34  ISP  [2X3_TEST_POINTS]  45.47,40.39 0 bottom
J35  [1X01_NO_SILK]  50.55,34.04 0 top
J36  QWIIC  [JST04_1MM_RA]  78.99,45.47 90 top
J37  QWIIC  [JST04_1MM_RA]  63.75,45.47 270 top
J38  [1X04_NO_SILK]  73.91,34.04 180 top
J39  ISP  [2X3_TEST_POINTS]  71.37,40.39 0 bottom
J40  [1X01_NO_SILK]  76.45,34.04 0 top
J41  QWIIC  [JST04_1MM_RA]  104.9,45.47 90 top
J42  QWIIC  [JST04_1MM_RA]  89.66,45.47 270 top
J43  [1X04_NO_SILK]  99.82,34.04 180 top
J44  ISP  [2X3_TEST_POINTS]  97.28,40.39 0 bottom
J45  [1X01_NO_SILK]  102.36,34.04 0 top
J46  QWIIC  [JST04_1MM_RA]  130.81,45.47 90 top
J47  QWIIC  [JST04_1MM_RA]  115.57,45.47 270 top
J48  [1X04_NO_SILK]  125.73,34.04 180 top
J49  ISP  [2X3_TEST_POINTS]  123.19,40.39 0 bottom
J50  [1X01_NO_SILK]  128.27,34.04 0 top
J51  QWIIC  [JST04_1MM_RA]  27.18,71.37 90 top
J52  QWIIC  [JST04_1MM_RA]  11.94,71.37 270 top
J53  [1X04_NO_SILK]  22.1,59.94 180 top
J54  ISP  [2X3_TEST_POINTS]  19.56,66.29 0 bottom
J55  [1X01_NO_SILK]  24.64,59.94 0 top
J56  QWIIC  [JST04_1MM_RA]  53.09,71.37 90 top
J57  QWIIC  [JST04_1MM_RA]  37.85,71.37 270 top
J58  [1X04_NO_SILK]  48.01,59.94 180 top
J59  ISP  [2X3_TEST_POINTS]  45.47,66.29 0 bottom
J60  [1X01_NO_SILK]  50.55,59.94 0 top
J61  QWIIC  [JST04_1MM_RA]  78.99,71.37 90 top
J62  QWIIC  [JST04_1MM_RA]  63.75,71.37 270 top
J63  [1X04_NO_SILK]  73.91,59.94 180 top
J64  ISP  [2X3_TEST_POINTS]  71.37,66.29 0 bottom
J65  [1X01_NO_SILK]  76.45,59.94 0 top
J66  QWIIC  [JST04_1MM_RA]  104.9,71.37 90 top
J67  QWIIC  [JST04_1MM_RA]  89.66,71.37 270 top
J68  [1X04_NO_SILK]  99.82,59.94 180 top
J69  ISP  [2X3_TEST_POINTS]  97.28,66.29 0 bottom
J70  [1X01_NO_SILK]  102.36,59.94 0 top
J71  QWIIC  [JST04_1MM_RA]  130.81,71.37 90 top
J72  QWIIC  [JST04_1MM_RA]  115.57,71.37 270 top
J73  [1X04_NO_SILK]  125.73,59.94 180 top
J74  ISP  [2X3_TEST_POINTS]  123.19,66.29 0 bottom
J75  [1X01_NO_SILK]  128.27,59.94 0 top
J76  QWIIC  [JST04_1MM_RA]  27.18,97.28 90 top
J77  QWIIC  [JST04_1MM_RA]  11.94,97.28 270 top
J78  [1X04_NO_SILK]  22.1,85.85 180 top
J79  ISP  [2X3_TEST_POINTS]  19.56,92.2 0 bottom
J80  [1X01_NO_SILK]  24.64,85.85 0 top
J81  QWIIC  [JST04_1MM_RA]  53.09,97.28 90 top
J82  QWIIC  [JST04_1MM_RA]  37.85,97.28 270 top
J83  [1X04_NO_SILK]  48.01,85.85 180 top
J84  ISP  [2X3_TEST_POINTS]  45.47,92.2 0 bottom
J85  [1X01_NO_SILK]  50.55,85.85 0 top
J86  QWIIC  [JST04_1MM_RA]  78.99,97.28 90 top
J87  QWIIC  [JST04_1MM_RA]  63.75,97.28 270 top
J88  [1X04_NO_SILK]  73.91,85.85 180 top
J89  ISP  [2X3_TEST_POINTS]  71.37,92.2 0 bottom
J90  [1X01_NO_SILK]  76.45,85.85 0 top
J91  QWIIC  [JST04_1MM_RA]  104.9,97.28 90 top
J92  QWIIC  [JST04_1MM_RA]  89.66,97.28 270 top
J93  [1X04_NO_SILK]  99.82,85.85 180 top
J94  ISP  [2X3_TEST_POINTS]  97.28,92.2 0 bottom
J95  [1X01_NO_SILK]  102.36,85.85 0 top
J96  QWIIC  [JST04_1MM_RA]  130.81,97.28 90 top
J97  QWIIC  [JST04_1MM_RA]  115.57,97.28 270 top
J98  [1X04_NO_SILK]  125.73,85.85 180 top
J99  ISP  [2X3_TEST_POINTS]  123.19,92.2 0 bottom
J100  [1X01_NO_SILK]  128.27,85.85 0 top
J101  QWIIC  [JST04_1MM_RA]  27.18,123.19 90 top
J102  QWIIC  [JST04_1MM_RA]  11.94,123.19 270 top
J103  [1X04_NO_SILK]  22.1,111.76 180 top
J104  ISP  [2X3_TEST_POINTS]  19.56,118.11 0 bottom
J105  [1X01_NO_SILK]  24.64,111.76 0 top
J106  QWIIC  [JST04_1MM_RA]  53.09,123.19 90 top
J107  QWIIC  [JST04_1MM_RA]  37.85,123.19 270 top
J108  [1X04_NO_SILK]  48.01,111.76 180 top
J109  ISP  [2X3_TEST_POINTS]  45.47,118.11 0 bottom
J110  [1X01_NO_SILK]  50.55,111.76 0 top
J111  QWIIC  [JST04_1MM_RA]  78.99,123.19 90 top
J112  QWIIC  [JST04_1MM_RA]  63.75,123.19 270 top
J113  [1X04_NO_SILK]  73.91,111.76 180 top
J114  ISP  [2X3_TEST_POINTS]  71.37,118.11 0 bottom
J115  [1X01_NO_SILK]  76.45,111.76 0 top
J116  QWIIC  [JST04_1MM_RA]  104.9,123.19 90 top
J117  QWIIC  [JST04_1MM_RA]  89.66,123.19 270 top
J118  [1X04_NO_SILK]  99.82,111.76 180 top
J119  ISP  [2X3_TEST_POINTS]  97.28,118.11 0 bottom
J120  [1X01_NO_SILK]  102.36,111.76 0 top
J121  QWIIC  [JST04_1MM_RA]  130.81,123.19 90 top
J122  QWIIC  [JST04_1MM_RA]  115.57,123.19 270 top
J123  [1X04_NO_SILK]  125.73,111.76 180 top
J124  ISP  [2X3_TEST_POINTS]  123.19,118.11 0 bottom
J125  [1X01_NO_SILK]  128.27,111.76 0 top
J126  QWIIC  [JST04_1MM_RA]  27.18,149.1 90 top
J127  QWIIC  [JST04_1MM_RA]  11.94,149.1 270 top
J128  [1X04_NO_SILK]  22.1,137.67 180 top
J129  ISP  [2X3_TEST_POINTS]  19.56,144.02 0 bottom
J130  [1X01_NO_SILK]  24.64,137.67 0 top
J131  QWIIC  [JST04_1MM_RA]  53.09,149.1 90 top
J132  QWIIC  [JST04_1MM_RA]  37.85,149.1 270 top
J133  [1X04_NO_SILK]  48.01,137.67 180 top
J134  ISP  [2X3_TEST_POINTS]  45.47,144.02 0 bottom
J135  [1X01_NO_SILK]  50.55,137.67 0 top
J136  QWIIC  [JST04_1MM_RA]  78.99,149.1 90 top
J137  QWIIC  [JST04_1MM_RA]  63.75,149.1 270 top
J138  [1X04_NO_SILK]  73.91,137.67 180 top
J139  ISP  [2X3_TEST_POINTS]  71.37,144.02 0 bottom
J140  [1X01_NO_SILK]  76.45,137.67 0 top
J141  QWIIC  [JST04_1MM_RA]  104.9,149.1 90 top
J142  QWIIC  [JST04_1MM_RA]  89.66,149.1 270 top
J143  [1X04_NO_SILK]  99.82,137.67 180 top
J144  ISP  [2X3_TEST_POINTS]  97.28,144.02 0 bottom
J145  [1X01_NO_SILK]  102.36,137.67 0 top
J146  QWIIC  [JST04_1MM_RA]  130.81,149.1 90 top
J147  QWIIC  [JST04_1MM_RA]  115.57,149.1 270 top
J148  [1X04_NO_SILK]  125.73,137.67 180 top
J149  ISP  [2X3_TEST_POINTS]  123.19,144.02 0 bottom
J150  [1X01_NO_SILK]  128.27,137.67 0 top
J151  QWIIC  [JST04_1MM_RA]  27.18,175.01 90 top
J152  QWIIC  [JST04_1MM_RA]  11.94,175.01 270 top
J153  [1X04_NO_SILK]  22.1,163.58 180 top
J154  ISP  [2X3_TEST_POINTS]  19.56,169.93 0 bottom
J155  [1X01_NO_SILK]  24.64,163.58 0 top
J156  QWIIC  [JST04_1MM_RA]  53.09,175.01 90 top
J157  QWIIC  [JST04_1MM_RA]  37.85,175.01 270 top
J158  [1X04_NO_SILK]  48.01,163.58 180 top
J159  ISP  [2X3_TEST_POINTS]  45.47,169.93 0 bottom
J160  [1X01_NO_SILK]  50.55,163.58 0 top
J161  QWIIC  [JST04_1MM_RA]  78.99,175.01 90 top
J162  QWIIC  [JST04_1MM_RA]  63.75,175.01 270 top
J163  [1X04_NO_SILK]  73.91,163.58 180 top
J164  ISP  [2X3_TEST_POINTS]  71.37,169.93 0 bottom
J165  [1X01_NO_SILK]  76.45,163.58 0 top
J166  QWIIC  [JST04_1MM_RA]  104.9,175.01 90 top
J167  QWIIC  [JST04_1MM_RA]  89.66,175.01 270 top
J168  [1X04_NO_SILK]  99.82,163.58 180 top
J169  ISP  [2X3_TEST_POINTS]  97.28,169.93 0 bottom
J170  [1X01_NO_SILK]  102.36,163.58 0 top
J171  QWIIC  [JST04_1MM_RA]  130.81,175.01 90 top
J172  QWIIC  [JST04_1MM_RA]  115.57,175.01 270 top
J173  [1X04_NO_SILK]  125.73,163.58 180 top
J174  ISP  [2X3_TEST_POINTS]  123.19,169.93 0 bottom
J175  [1X01_NO_SILK]  128.27,163.58 0 top
JP1  FIDUCIALUFIDUCIAL  [MICRO-FIDUCIAL]  57.4,31.5 0 bottom
JP2  FIDUCIALUFIDUCIAL  [MICRO-FIDUCIAL]  31.5,31.5 0 bottom
JP3  FIDUCIALUFIDUCIAL  [MICRO-FIDUCIAL]  34.04,8.13 0 bottom
JP4  FIDUCIALUFIDUCIAL  [MICRO-FIDUCIAL]  34.04,8.13 0 top
JP5  FIDUCIALUFIDUCIAL  [MICRO-FIDUCIAL]  57.4,31.5 0 top
JP6  FIDUCIALUFIDUCIAL  [MICRO-FIDUCIAL]  8.13,8.13 0 bottom
JP7  FIDUCIALUFIDUCIAL  [MICRO-FIDUCIAL]  83.31,31.5 0 bottom
JP8  FIDUCIALUFIDUCIAL  [MICRO-FIDUCIAL]  8.13,8.13 0 top
JP9  FIDUCIALUFIDUCIAL  [MICRO-FIDUCIAL]  31.5,31.5 0 top
JP10  FIDUCIALUFIDUCIAL  [MICRO-FIDUCIAL]  59.94,8.13 0 bottom
JP11  FIDUCIALUFIDUCIAL  [MICRO-FIDUCIAL]  59.94,8.13 0 top
JP12  FIDUCIALUFIDUCIAL  [MICRO-FIDUCIAL]  83.31,31.5 0 top
JP13  FIDUCIALUFIDUCIAL  [MICRO-FIDUCIAL]  109.22,31.5 0 bottom
JP14  FIDUCIALUFIDUCIAL  [MICRO-FIDUCIAL]  85.85,8.13 0 bottom
JP15  FIDUCIALUFIDUCIAL  [MICRO-FIDUCIAL]  85.85,8.13 0 top
JP16  FIDUCIALUFIDUCIAL  [MICRO-FIDUCIAL]  109.22,31.5 0 top
JP17  FIDUCIALUFIDUCIAL  [MICRO-FIDUCIAL]  135.13,31.5 0 bottom
JP18  FIDUCIALUFIDUCIAL  [MICRO-FIDUCIAL]  111.76,8.13 0 bottom
JP19  FIDUCIALUFIDUCIAL  [MICRO-FIDUCIAL]  111.76,8.13 0 top
JP20  FIDUCIALUFIDUCIAL  [MICRO-FIDUCIAL]  135.13,31.5 0 top
JP21  FIDUCIALUFIDUCIAL  [MICRO-FIDUCIAL]  31.5,57.4 0 bottom
JP22  FIDUCIALUFIDUCIAL  [MICRO-FIDUCIAL]  8.13,34.04 0 bottom
JP23  FIDUCIALUFIDUCIAL  [MICRO-FIDUCIAL]  8.13,34.04 0 top
JP24  FIDUCIALUFIDUCIAL  [MICRO-FIDUCIAL]  31.5,57.4 0 top
JP25  FIDUCIALUFIDUCIAL  [MICRO-FIDUCIAL]  57.4,57.4 0 bottom
JP26  FIDUCIALUFIDUCIAL  [MICRO-FIDUCIAL]  34.04,34.04 0 bottom
JP27  FIDUCIALUFIDUCIAL  [MICRO-FIDUCIAL]  34.04,34.04 0 top
JP28  FIDUCIALUFIDUCIAL  [MICRO-FIDUCIAL]  57.4,57.4 0 top
JP29  FIDUCIALUFIDUCIAL  [MICRO-FIDUCIAL]  83.31,57.4 0 bottom
JP30  FIDUCIALUFIDUCIAL  [MICRO-FIDUCIAL]  59.94,34.04 0 bottom
JP31  FIDUCIALUFIDUCIAL  [MICRO-FIDUCIAL]  59.94,34.04 0 top
JP32  FIDUCIALUFIDUCIAL  [MICRO-FIDUCIAL]  83.31,57.4 0 top
JP33  FIDUCIALUFIDUCIAL  [MICRO-FIDUCIAL]  109.22,57.4 0 bottom
JP34  FIDUCIALUFIDUCIAL  [MICRO-FIDUCIAL]  85.85,34.04 0 bottom
JP35  FIDUCIALUFIDUCIAL  [MICRO-FIDUCIAL]  85.85,34.04 0 top
JP36  FIDUCIALUFIDUCIAL  [MICRO-FIDUCIAL]  109.22,57.4 0 top
JP37  FIDUCIALUFIDUCIAL  [MICRO-FIDUCIAL]  135.13,57.4 0 bottom
JP38  FIDUCIALUFIDUCIAL  [MICRO-FIDUCIAL]  111.76,34.04 0 bottom
JP39  FIDUCIALUFIDUCIAL  [MICRO-FIDUCIAL]  111.76,34.04 0 top
JP40  FIDUCIALUFIDUCIAL  [MICRO-FIDUCIAL]  135.13,57.4 0 top
JP41  FIDUCIALUFIDUCIAL  [MICRO-FIDUCIAL]  31.5,83.31 0 bottom
JP42  FIDUCIALUFIDUCIAL  [MICRO-FIDUCIAL]  8.13,59.94 0 bottom
JP43  FIDUCIALUFIDUCIAL  [MICRO-FIDUCIAL]  8.13,59.94 0 top
JP44  FIDUCIALUFIDUCIAL  [MICRO-FIDUCIAL]  31.5,83.31 0 top
JP45  FIDUCIALUFIDUCIAL  [MICRO-FIDUCIAL]  57.4,83.31 0 bottom
JP46  FIDUCIALUFIDUCIAL  [MICRO-FIDUCIAL]  34.04,59.94 0 bottom
JP47  FIDUCIALUFIDUCIAL  [MICRO-FIDUCIAL]  34.04,59.94 0 top
JP48  FIDUCIALUFIDUCIAL  [MICRO-FIDUCIAL]  57.4,83.31 0 top
JP49  FIDUCIALUFIDUCIAL  [MICRO-FIDUCIAL]  83.31,83.31 0 bottom
JP50  FIDUCIALUFIDUCIAL  [MICRO-FIDUCIAL]  59.94,59.94 0 bottom
JP51  FIDUCIALUFIDUCIAL  [MICRO-FIDUCIAL]  59.94,59.94 0 top
JP52  FIDUCIALUFIDUCIAL  [MICRO-FIDUCIAL]  83.31,83.31 0 top
JP53  FIDUCIALUFIDUCIAL  [MICRO-FIDUCIAL]  109.22,83.31 0 bottom
JP54  FIDUCIALUFIDUCIAL  [MICRO-FIDUCIAL]  85.85,59.94 0 bottom
JP55  FIDUCIALUFIDUCIAL  [MICRO-FIDUCIAL]  85.85,59.94 0 top
JP56  FIDUCIALUFIDUCIAL  [MICRO-FIDUCIAL]  109.22,83.31 0 top
JP57  FIDUCIALUFIDUCIAL  [MICRO-FIDUCIAL]  135.13,83.31 0 bottom
JP58  FIDUCIALUFIDUCIAL  [MICRO-FIDUCIAL]  111.76,59.94 0 bottom
JP59  FIDUCIALUFIDUCIAL  [MICRO-FIDUCIAL]  111.76,59.94 0 top
JP60  FIDUCIALUFIDUCIAL  [MICRO-FIDUCIAL]  135.13,83.31 0 top
JP61  FIDUCIALUFIDUCIAL  [MICRO-FIDUCIAL]  31.5,109.22 0 bottom
JP62  FIDUCIALUFIDUCIAL  [MICRO-FIDUCIAL]  8.13,85.85 0 bottom
JP63  FIDUCIALUFIDUCIAL  [MICRO-FIDUCIAL]  8.13,85.85 0 top
JP64  FIDUCIALUFIDUCIAL  [MICRO-FIDUCIAL]  31.5,109.22 0 top
JP65  FIDUCIALUFIDUCIAL  [MICRO-FIDUCIAL]  57.4,109.22 0 bottom
JP66  FIDUCIALUFIDUCIAL  [MICRO-FIDUCIAL]  34.04,85.85 0 bottom
JP67  FIDUCIALUFIDUCIAL  [MICRO-FIDUCIAL]  34.04,85.85 0 top
JP68  FIDUCIALUFIDUCIAL  [MICRO-FIDUCIAL]  57.4,109.22 0 top
JP69  FIDUCIALUFIDUCIAL  [MICRO-FIDUCIAL]  83.31,109.22 0 bottom
JP70  FIDUCIALUFIDUCIAL  [MICRO-FIDUCIAL]  59.94,85.85 0 bottom
JP71  FIDUCIALUFIDUCIAL  [MICRO-FIDUCIAL]  59.94,85.85 0 top
JP72  FIDUCIALUFIDUCIAL  [MICRO-FIDUCIAL]  83.31,109.22 0 top
JP73  FIDUCIALUFIDUCIAL  [MICRO-FIDUCIAL]  109.22,109.22 0 bottom
JP74  FIDUCIALUFIDUCIAL  [MICRO-FIDUCIAL]  85.85,85.85 0 bottom
JP75  FIDUCIALUFIDUCIAL  [MICRO-FIDUCIAL]  85.85,85.85 0 top
JP76  FIDUCIALUFIDUCIAL  [MICRO-FIDUCIAL]  109.22,109.22 0 top
JP77  FIDUCIALUFIDUCIAL  [MICRO-FIDUCIAL]  135.13,109.22 0 bottom
JP78  FIDUCIALUFIDUCIAL  [MICRO-FIDUCIAL]  111.76,85.85 0 bottom
JP79  FIDUCIALUFIDUCIAL  [MICRO-FIDUCIAL]  111.76,85.85 0 top
JP80  FIDUCIALUFIDUCIAL  [MICRO-FIDUCIAL]  135.13,109.22 0 top
JP81  FIDUCIALUFIDUCIAL  [MICRO-FIDUCIAL]  31.5,135.13 0 bottom
JP82  FIDUCIALUFIDUCIAL  [MICRO-FIDUCIAL]  8.13,111.76 0 bottom
JP83  FIDUCIALUFIDUCIAL  [MICRO-FIDUCIAL]  8.13,111.76 0 top
JP84  FIDUCIALUFIDUCIAL  [MICRO-FIDUCIAL]  31.5,135.13 0 top
JP85  FIDUCIALUFIDUCIAL  [MICRO-FIDUCIAL]  57.4,135.13 0 bottom
JP86  FIDUCIALUFIDUCIAL  [MICRO-FIDUCIAL]  34.04,111.76 0 bottom
JP87  FIDUCIALUFIDUCIAL  [MICRO-FIDUCIAL]  34.04,111.76 0 top
JP88  FIDUCIALUFIDUCIAL  [MICRO-FIDUCIAL]  57.4,135.13 0 top
JP89  FIDUCIALUFIDUCIAL  [MICRO-FIDUCIAL]  83.31,135.13 0 bottom
JP90  FIDUCIALUFIDUCIAL  [MICRO-FIDUCIAL]  59.94,111.76 0 bottom
JP91  FIDUCIALUFIDUCIAL  [MICRO-FIDUCIAL]  59.94,111.76 0 top
JP92  FIDUCIALUFIDUCIAL  [MICRO-FIDUCIAL]  83.31,135.13 0 top
JP93  FIDUCIALUFIDUCIAL  [MICRO-FIDUCIAL]  109.22,135.13 0 bottom
JP94  FIDUCIALUFIDUCIAL  [MICRO-FIDUCIAL]  85.85,111.76 0 bottom
JP95  FIDUCIALUFIDUCIAL  [MICRO-FIDUCIAL]  85.85,111.76 0 top
JP96  FIDUCIALUFIDUCIAL  [MICRO-FIDUCIAL]  109.22,135.13 0 top
JP97  FIDUCIALUFIDUCIAL  [MICRO-FIDUCIAL]  135.13,135.13 0 bottom
JP98  FIDUCIALUFIDUCIAL  [MICRO-FIDUCIAL]  111.76,111.76 0 bottom
JP99  FIDUCIALUFIDUCIAL  [MICRO-FIDUCIAL]  111.76,111.76 0 top
JP100  FIDUCIALUFIDUCIAL  [MICRO-FIDUCIAL]  135.13,135.13 0 top
JP101  FIDUCIALUFIDUCIAL  [MICRO-FIDUCIAL]  31.5,161.04 0 bottom
JP102  FIDUCIALUFIDUCIAL  [MICRO-FIDUCIAL]  8.13,137.67 0 bottom
JP103  FIDUCIALUFIDUCIAL  [MICRO-FIDUCIAL]  8.13,137.67 0 top
JP104  FIDUCIALUFIDUCIAL  [MICRO-FIDUCIAL]  31.5,161.04 0 top
JP105  FIDUCIALUFIDUCIAL  [MICRO-FIDUCIAL]  57.4,161.04 0 bottom
JP106  FIDUCIALUFIDUCIAL  [MICRO-FIDUCIAL]  34.04,137.67 0 bottom
JP107  FIDUCIALUFIDUCIAL  [MICRO-FIDUCIAL]  34.04,137.67 0 top
JP108  FIDUCIALUFIDUCIAL  [MICRO-FIDUCIAL]  57.4,161.04 0 top
JP109  FIDUCIALUFIDUCIAL  [MICRO-FIDUCIAL]  83.31,161.04 0 bottom
JP110  FIDUCIALUFIDUCIAL  [MICRO-FIDUCIAL]  59.94,137.67 0 bottom
JP111  FIDUCIALUFIDUCIAL  [MICRO-FIDUCIAL]  59.94,137.67 0 top
JP112  FIDUCIALUFIDUCIAL  [MICRO-FIDUCIAL]  83.31,161.04 0 top
JP113  FIDUCIALUFIDUCIAL  [MICRO-FIDUCIAL]  109.22,161.04 0 bottom
JP114  FIDUCIALUFIDUCIAL  [MICRO-FIDUCIAL]  85.85,137.67 0 bottom
JP115  FIDUCIALUFIDUCIAL  [MICRO-FIDUCIAL]  85.85,137.67 0 top
JP116  FIDUCIALUFIDUCIAL  [MICRO-FIDUCIAL]  109.22,161.04 0 top
JP117  FIDUCIALUFIDUCIAL  [MICRO-FIDUCIAL]  135.13,161.04 0 bottom
JP118  FIDUCIALUFIDUCIAL  [MICRO-FIDUCIAL]  111.76,137.67 0 bottom
JP119  FIDUCIALUFIDUCIAL  [MICRO-FIDUCIAL]  111.76,137.67 0 top
JP120  FIDUCIALUFIDUCIAL  [MICRO-FIDUCIAL]  135.13,161.04 0 top
JP121  FIDUCIALUFIDUCIAL  [MICRO-FIDUCIAL]  31.5,186.94 0 bottom
JP122  FIDUCIALUFIDUCIAL  [MICRO-FIDUCIAL]  8.13,163.58 0 bottom
JP123  FIDUCIALUFIDUCIAL  [MICRO-FIDUCIAL]  8.13,163.58 0 top
JP124  FIDUCIALUFIDUCIAL  [MICRO-FIDUCIAL]  31.5,186.94 0 top
JP125  FIDUCIALUFIDUCIAL  [MICRO-FIDUCIAL]  57.4,186.94 0 bottom
JP126  FIDUCIALUFIDUCIAL  [MICRO-FIDUCIAL]  34.04,163.58 0 bottom
JP127  FIDUCIALUFIDUCIAL  [MICRO-FIDUCIAL]  34.04,163.58 0 top
JP128  FIDUCIALUFIDUCIAL  [MICRO-FIDUCIAL]  57.4,186.94 0 top
JP129  FIDUCIALUFIDUCIAL  [MICRO-FIDUCIAL]  83.31,186.94 0 bottom
JP130  FIDUCIALUFIDUCIAL  [MICRO-FIDUCIAL]  59.94,163.58 0 bottom
JP131  FIDUCIALUFIDUCIAL  [MICRO-FIDUCIAL]  59.94,163.58 0 top
JP132  FIDUCIALUFIDUCIAL  [MICRO-FIDUCIAL]  83.31,186.94 0 top
JP133  FIDUCIALUFIDUCIAL  [MICRO-FIDUCIAL]  109.22,186.94 0 bottom
JP134  FIDUCIALUFIDUCIAL  [MICRO-FIDUCIAL]  85.85,163.58 0 bottom
JP135  FIDUCIALUFIDUCIAL  [MICRO-FIDUCIAL]  85.85,163.58 0 top
JP136  FIDUCIALUFIDUCIAL  [MICRO-FIDUCIAL]  109.22,186.94 0 top
JP137  FIDUCIALUFIDUCIAL  [MICRO-FIDUCIAL]  135.13,186.94 0 bottom
JP138  FIDUCIALUFIDUCIAL  [MICRO-FIDUCIAL]  111.76,163.58 0 bottom
JP139  FIDUCIALUFIDUCIAL  [MICRO-FIDUCIAL]  111.76,163.58 0 top
JP140  FIDUCIALUFIDUCIAL  [MICRO-FIDUCIAL]  135.13,186.94 0 top
LOGO1  OSHW-LOGOMINI  [OSHW-LOGO-MINI]  29.08,8.76 0 bottom
LOGO2  QWIIC_LOGO_5MM  [QWIIC_5MM]  29.21,14.99 0 top
LOGO3  SFE_LOGO_NAME.1_INCH  [SFE_LOGO_NAME_.1]  19.56,29.72 0 bottom
LOGO4  SFE_LOGO_FLAME.1_INCH  [SFE_LOGO_FLAME_.1]  12.38,26.23 0 top
LOGO5  OSHW-LOGOMINI  [OSHW-LOGO-MINI]  54.99,8.76 0 bottom
LOGO6  SFE_LOGO_NAME.1_INCH  [SFE_LOGO_NAME_.1]  45.47,29.72 0 bottom
LOGO7  SFE_LOGO_FLAME.1_INCH  [SFE_LOGO_FLAME_.1]  38.29,26.23 0 top
LOGO8  QWIIC_LOGO_5MM  [QWIIC_5MM]  55.12,14.99 0 top
LOGO9  OSHW-LOGOMINI  [OSHW-LOGO-MINI]  80.9,8.76 0 bottom
LOGO10  SFE_LOGO_NAME.1_INCH  [SFE_LOGO_NAME_.1]  71.37,29.72 0 bottom
LOGO11  SFE_LOGO_FLAME.1_INCH  [SFE_LOGO_FLAME_.1]  64.2,26.23 0 top
LOGO12  QWIIC_LOGO_5MM  [QWIIC_5MM]  81.03,14.99 0 top
LOGO13  OSHW-LOGOMINI  [OSHW-LOGO-MINI]  106.81,8.76 0 bottom
LOGO14  SFE_LOGO_NAME.1_INCH  [SFE_LOGO_NAME_.1]  97.28,29.72 0 bottom
LOGO15  SFE_LOGO_FLAME.1_INCH  [SFE_LOGO_FLAME_.1]  90.11,26.23 0 top
LOGO16  QWIIC_LOGO_5MM  [QWIIC_5MM]  106.93,14.99 0 top
LOGO17  OSHW-LOGOMINI  [OSHW-LOGO-MINI]  132.72,8.76 0 bottom
LOGO18  SFE_LOGO_NAME.1_INCH  [SFE_LOGO_NAME_.1]  123.19,29.72 0 bottom
LOGO19  SFE_LOGO_FLAME.1_INCH  [SFE_LOGO_FLAME_.1]  116.01,26.23 0 top
LOGO20  QWIIC_LOGO_5MM  [QWIIC_5MM]  132.84,14.99 0 top
LOGO21  OSHW-LOGOMINI  [OSHW-LOGO-MINI]  29.08,34.67 0 bottom
LOGO22  SFE_LOGO_NAME.1_INCH  [SFE_LOGO_NAME_.1]  19.56,55.63 0 bottom
LOGO23  SFE_LOGO_FLAME.1_INCH  [SFE_LOGO_FLAME_.1]  12.38,52.13 0 top
LOGO24  QWIIC_LOGO_5MM  [QWIIC_5MM]  29.21,40.89 0 top
LOGO25  OSHW-LOGOMINI  [OSHW-LOGO-MINI]  54.99,34.67 0 bottom
LOGO26  SFE_LOGO_NAME.1_INCH  [SFE_LOGO_NAME_.1]  45.47,55.63 0 bottom
LOGO27  SFE_LOGO_FLAME.1_INCH  [SFE_LOGO_FLAME_.1]  38.29,52.13 0 top
LOGO28  QWIIC_LOGO_5MM  [QWIIC_5MM]  55.12,40.89 0 top
LOGO29  OSHW-LOGOMINI  [OSHW-LOGO-MINI]  80.9,34.67 0 bottom
LOGO30  SFE_LOGO_NAME.1_INCH  [SFE_LOGO_NAME_.1]  71.37,55.63 0 bottom
LOGO31  SFE_LOGO_FLAME.1_INCH  [SFE_LOGO_FLAME_.1]  64.2,52.13 0 top
LOGO32  QWIIC_LOGO_5MM  [QWIIC_5MM]  81.03,40.89 0 top
LOGO33  OSHW-LOGOMINI  [OSHW-LOGO-MINI]  106.81,34.67 0 bottom
LOGO34  SFE_LOGO_NAME.1_INCH  [SFE_LOGO_NAME_.1]  97.28,55.63 0 bottom
LOGO35  SFE_LOGO_FLAME.1_INCH  [SFE_LOGO_FLAME_.1]  90.11,52.13 0 top
LOGO36  QWIIC_LOGO_5MM  [QWIIC_5MM]  106.93,40.89 0 top
LOGO37  OSHW-LOGOMINI  [OSHW-LOGO-MINI]  132.72,34.67 0 bottom
LOGO38  SFE_LOGO_NAME.1_INCH  [SFE_LOGO_NAME_.1]  123.19,55.63 0 bottom
LOGO39  SFE_LOGO_FLAME.1_INCH  [SFE_LOGO_FLAME_.1]  116.01,52.13 0 top
LOGO40  QWIIC_LOGO_5MM  [QWIIC_5MM]  132.84,40.89 0 top
LOGO41  OSHW-LOGOMINI  [OSHW-LOGO-MINI]  29.08,60.58 0 bottom
LOGO42  SFE_LOGO_NAME.1_INCH  [SFE_LOGO_NAME_.1]  19.56,81.53 0 bottom
LOGO43  SFE_LOGO_FLAME.1_INCH  [SFE_LOGO_FLAME_.1]  12.38,78.04 0 top
LOGO44  QWIIC_LOGO_5MM  [QWIIC_5MM]  29.21,66.8 0 top
LOGO45  OSHW-LOGOMINI  [OSHW-LOGO-MINI]  54.99,60.58 0 bottom
LOGO46  SFE_LOGO_NAME.1_INCH  [SFE_LOGO_NAME_.1]  45.47,81.53 0 bottom
LOGO47  SFE_LOGO_FLAME.1_INCH  [SFE_LOGO_FLAME_.1]  38.29,78.04 0 top
LOGO48  QWIIC_LOGO_5MM  [QWIIC_5MM]  55.12,66.8 0 top
LOGO49  OSHW-LOGOMINI  [OSHW-LOGO-MINI]  80.9,60.58 0 bottom
LOGO50  SFE_LOGO_NAME.1_INCH  [SFE_LOGO_NAME_.1]  71.37,81.53 0 bottom
LOGO51  SFE_LOGO_FLAME.1_INCH  [SFE_LOGO_FLAME_.1]  64.2,78.04 0 top
LOGO52  QWIIC_LOGO_5MM  [QWIIC_5MM]  81.03,66.8 0 top
LOGO53  OSHW-LOGOMINI  [OSHW-LOGO-MINI]  106.81,60.58 0 bottom
LOGO54  SFE_LOGO_NAME.1_INCH  [SFE_LOGO_NAME_.1]  97.28,81.53 0 bottom
LOGO55  SFE_LOGO_FLAME.1_INCH  [SFE_LOGO_FLAME_.1]  90.11,78.04 0 top
LOGO56  QWIIC_LOGO_5MM  [QWIIC_5MM]  106.93,66.8 0 top
LOGO57  OSHW-LOGOMINI  [OSHW-LOGO-MINI]  132.72,60.58 0 bottom
LOGO58  SFE_LOGO_NAME.1_INCH  [SFE_LOGO_NAME_.1]  123.19,81.53 0 bottom
LOGO59  SFE_LOGO_FLAME.1_INCH  [SFE_LOGO_FLAME_.1]  116.01,78.04 0 top
LOGO60  QWIIC_LOGO_5MM  [QWIIC_5MM]  132.84,66.8 0 top
LOGO61  OSHW-LOGOMINI  [OSHW-LOGO-MINI]  29.08,86.49 0 bottom
LOGO62  SFE_LOGO_NAME.1_INCH  [SFE_LOGO_NAME_.1]  19.56,107.44 0 bottom
LOGO63  SFE_LOGO_FLAME.1_INCH  [SFE_LOGO_FLAME_.1]  12.38,103.95 0 top
LOGO64  QWIIC_LOGO_5MM  [QWIIC_5MM]  29.21,92.71 0 top
LOGO65  OSHW-LOGOMINI  [OSHW-LOGO-MINI]  54.99,86.49 0 bottom
LOGO66  SFE_LOGO_NAME.1_INCH  [SFE_LOGO_NAME_.1]  45.47,107.44 0 bottom
LOGO67  SFE_LOGO_FLAME.1_INCH  [SFE_LOGO_FLAME_.1]  38.29,103.95 0 top
LOGO68  QWIIC_LOGO_5MM  [QWIIC_5MM]  55.12,92.71 0 top
LOGO69  OSHW-LOGOMINI  [OSHW-LOGO-MINI]  80.9,86.49 0 bottom
LOGO70  SFE_LOGO_NAME.1_INCH  [SFE_LOGO_NAME_.1]  71.37,107.44 0 bottom
LOGO71  SFE_LOGO_FLAME.1_INCH  [SFE_LOGO_FLAME_.1]  64.2,103.95 0 top
LOGO72  QWIIC_LOGO_5MM  [QWIIC_5MM]  81.03,92.71 0 top
LOGO73  OSHW-LOGOMINI  [OSHW-LOGO-MINI]  106.81,86.49 0 bottom
LOGO74  SFE_LOGO_NAME.1_INCH  [SFE_LOGO_NAME_.1]  97.28,107.44 0 bottom
LOGO75  SFE_LOGO_FLAME.1_INCH  [SFE_LOGO_FLAME_.1]  90.11,103.95 0 top
LOGO76  QWIIC_LOGO_5MM  [QWIIC_5MM]  106.93,92.71 0 top
LOGO77  OSHW-LOGOMINI  [OSHW-LOGO-MINI]  132.72,86.49 0 bottom
LOGO78  SFE_LOGO_NAME.1_INCH  [SFE_LOGO_NAME_.1]  123.19,107.44 0 bottom
LOGO79  SFE_LOGO_FLAME.1_INCH  [SFE_LOGO_FLAME_.1]  116.01,103.95 0 top
LOGO80  QWIIC_LOGO_5MM  [QWIIC_5MM]  132.84,92.71 0 top
LOGO81  OSHW-LOGOMINI  [OSHW-LOGO-MINI]  29.08,112.4 0 bottom
LOGO82  SFE_LOGO_NAME.1_INCH  [SFE_LOGO_NAME_.1]  19.56,133.35 0 bottom
LOGO83  SFE_LOGO_FLAME.1_INCH  [SFE_LOGO_FLAME_.1]  12.38,129.86 0 top
LOGO84  QWIIC_LOGO_5MM  [QWIIC_5MM]  29.21,118.62 0 top
LOGO85  OSHW-LOGOMINI  [OSHW-LOGO-MINI]  54.99,112.4 0 bottom
LOGO86  SFE_LOGO_NAME.1_INCH  [SFE_LOGO_NAME_.1]  45.47,133.35 0 bottom
LOGO87  SFE_LOGO_FLAME.1_INCH  [SFE_LOGO_FLAME_.1]  38.29,129.86 0 top
LOGO88  QWIIC_LOGO_5MM  [QWIIC_5MM]  55.12,118.62 0 top
LOGO89  OSHW-LOGOMINI  [OSHW-LOGO-MINI]  80.9,112.4 0 bottom
LOGO90  SFE_LOGO_NAME.1_INCH  [SFE_LOGO_NAME_.1]  71.37,133.35 0 bottom
LOGO91  SFE_LOGO_FLAME.1_INCH  [SFE_LOGO_FLAME_.1]  64.2,129.86 0 top
LOGO92  QWIIC_LOGO_5MM  [QWIIC_5MM]  81.03,118.62 0 top
LOGO93  OSHW-LOGOMINI  [OSHW-LOGO-MINI]  106.81,112.4 0 bottom
LOGO94  SFE_LOGO_NAME.1_INCH  [SFE_LOGO_NAME_.1]  97.28,133.35 0 bottom
LOGO95  SFE_LOGO_FLAME.1_INCH  [SFE_LOGO_FLAME_.1]  90.11,129.86 0 top
LOGO96  QWIIC_LOGO_5MM  [QWIIC_5MM]  106.93,118.62 0 top
LOGO97  OSHW-LOGOMINI  [OSHW-LOGO-MINI]  132.72,112.4 0 bottom
LOGO98  SFE_LOGO_NAME.1_INCH  [SFE_LOGO_NAME_.1]  123.19,133.35 0 bottom
LOGO99  SFE_LOGO_FLAME.1_INCH  [SFE_LOGO_FLAME_.1]  116.01,129.86 0 top
LOGO100  QWIIC_LOGO_5MM  [QWIIC_5MM]  132.84,118.62 0 top
LOGO101  OSHW-LOGOMINI  [OSHW-LOGO-MINI]  29.08,138.3 0 bottom
LOGO102  SFE_LOGO_NAME.1_INCH  [SFE_LOGO_NAME_.1]  19.56,159.26 0 bottom
LOGO103  SFE_LOGO_FLAME.1_INCH  [SFE_LOGO_FLAME_.1]  12.38,155.77 0 top
LOGO104  QWIIC_LOGO_5MM  [QWIIC_5MM]  29.21,144.53 0 top
LOGO105  OSHW-LOGOMINI  [OSHW-LOGO-MINI]  54.99,138.3 0 bottom
LOGO106  SFE_LOGO_NAME.1_INCH  [SFE_LOGO_NAME_.1]  45.47,159.26 0 bottom
LOGO107  SFE_LOGO_FLAME.1_INCH  [SFE_LOGO_FLAME_.1]  38.29,155.77 0 top
LOGO108  QWIIC_LOGO_5MM  [QWIIC_5MM]  55.12,144.53 0 top
LOGO109  OSHW-LOGOMINI  [OSHW-LOGO-MINI]  80.9,138.3 0 bottom
LOGO110  SFE_LOGO_NAME.1_INCH  [SFE_LOGO_NAME_.1]  71.37,159.26 0 bottom
LOGO111  SFE_LOGO_FLAME.1_INCH  [SFE_LOGO_FLAME_.1]  64.2,155.77 0 top
LOGO112  QWIIC_LOGO_5MM  [QWIIC_5MM]  81.03,144.53 0 top
LOGO113  OSHW-LOGOMINI  [OSHW-LOGO-MINI]  106.81,138.3 0 bottom
LOGO114  SFE_LOGO_NAME.1_INCH  [SFE_LOGO_NAME_.1]  97.28,159.26 0 bottom
LOGO115  SFE_LOGO_FLAME.1_INCH  [SFE_LOGO_FLAME_.1]  90.11,155.77 0 top
LOGO116  QWIIC_LOGO_5MM  [QWIIC_5MM]  106.93,144.53 0 top
LOGO117  OSHW-LOGOMINI  [OSHW-LOGO-MINI]  132.72,138.3 0 bottom
LOGO118  SFE_LOGO_NAME.1_INCH  [SFE_LOGO_NAME_.1]  123.19,159.26 0 bottom
LOGO119  SFE_LOGO_FLAME.1_INCH  [SFE_LOGO_FLAME_.1]  116.01,155.77 0 top
LOGO120  QWIIC_LOGO_5MM  [QWIIC_5MM]  132.84,144.53 0 top
LOGO121  OSHW-LOGOMINI  [OSHW-LOGO-MINI]  29.08,164.21 0 bottom
LOGO122  SFE_LOGO_NAME.1_INCH  [SFE_LOGO_NAME_.1]  19.56,185.17 0 bottom
LOGO123  SFE_LOGO_FLAME.1_INCH  [SFE_LOGO_FLAME_.1]  12.38,181.67 0 top
LOGO124  QWIIC_LOGO_5MM  [QWIIC_5MM]  29.21,170.43 0 top
LOGO125  OSHW-LOGOMINI  [OSHW-LOGO-MINI]  54.99,164.21 0 bottom
LOGO126  SFE_LOGO_NAME.1_INCH  [SFE_LOGO_NAME_.1]  45.47,185.17 0 bottom
LOGO127  SFE_LOGO_FLAME.1_INCH  [SFE_LOGO_FLAME_.1]  38.29,181.67 0 top
LOGO128  QWIIC_LOGO_5MM  [QWIIC_5MM]  55.12,170.43 0 top
LOGO129  OSHW-LOGOMINI  [OSHW-LOGO-MINI]  80.9,164.21 0 bottom
LOGO130  SFE_LOGO_NAME.1_INCH  [SFE_LOGO_NAME_.1]  71.37,185.17 0 bottom
LOGO131  SFE_LOGO_FLAME.1_INCH  [SFE_LOGO_FLAME_.1]  64.2,181.67 0 top
LOGO132  QWIIC_LOGO_5MM  [QWIIC_5MM]  81.03,170.43 0 top
LOGO133  OSHW-LOGOMINI  [OSHW-LOGO-MINI]  106.81,164.21 0 bottom
LOGO134  SFE_LOGO_NAME.1_INCH  [SFE_LOGO_NAME_.1]  97.28,185.17 0 bottom
LOGO135  SFE_LOGO_FLAME.1_INCH  [SFE_LOGO_FLAME_.1]  90.11,181.67 0 top
LOGO136  QWIIC_LOGO_5MM  [QWIIC_5MM]  106.93,170.43 0 top
LOGO137  OSHW-LOGOMINI  [OSHW-LOGO-MINI]  132.72,164.21 0 bottom
LOGO138  SFE_LOGO_NAME.1_INCH  [SFE_LOGO_NAME_.1]  123.19,185.17 0 bottom
LOGO139  SFE_LOGO_FLAME.1_INCH  [SFE_LOGO_FLAME_.1]  116.01,181.67 0 top
LOGO140  QWIIC_LOGO_5MM  [QWIIC_5MM]  132.84,170.43 0 top
PWR  JUMPER-SMT_2_NC_TRACE_SILK  [SMT-JUMPER_2_NC_TRACE_SILK]  10.73,8.7 270 top
PWR1  JUMPER-SMT_2_NC_TRACE_SILK  [SMT-JUMPER_2_NC_TRACE_SILK]  36.64,8.7 270 top
PWR2  JUMPER-SMT_2_NC_TRACE_SILK  [SMT-JUMPER_2_NC_TRACE_SILK]  62.55,8.7 270 top
PWR3  JUMPER-SMT_2_NC_TRACE_SILK  [SMT-JUMPER_2_NC_TRACE_SILK]  88.46,8.7 270 top
PWR4  JUMPER-SMT_2_NC_TRACE_SILK  [SMT-JUMPER_2_NC_TRACE_SILK]  114.36,8.7 270 top
PWR5  JUMPER-SMT_2_NC_TRACE_SILK  [SMT-JUMPER_2_NC_TRACE_SILK]  10.73,34.61 270 top
PWR6  JUMPER-SMT_2_NC_TRACE_SILK  [SMT-JUMPER_2_NC_TRACE_SILK]  36.64,34.61 270 top
PWR7  JUMPER-SMT_2_NC_TRACE_SILK  [SMT-JUMPER_2_NC_TRACE_SILK]  62.55,34.61 270 top
PWR8  JUMPER-SMT_2_NC_TRACE_SILK  [SMT-JUMPER_2_NC_TRACE_SILK]  88.46,34.61 270 top
PWR9  JUMPER-SMT_2_NC_TRACE_SILK  [SMT-JUMPER_2_NC_TRACE_SILK]  114.36,34.61 270 top
PWR10  JUMPER-SMT_2_NC_TRACE_SILK  [SMT-JUMPER_2_NC_TRACE_SILK]  10.73,60.52 270 top
PWR11  JUMPER-SMT_2_NC_TRACE_SILK  [SMT-JUMPER_2_NC_TRACE_SILK]  36.64,60.52 270 top
PWR12  JUMPER-SMT_2_NC_TRACE_SILK  [SMT-JUMPER_2_NC_TRACE_SILK]  62.55,60.52 270 top
PWR13  JUMPER-SMT_2_NC_TRACE_SILK  [SMT-JUMPER_2_NC_TRACE_SILK]  88.46,60.52 270 top
PWR14  JUMPER-SMT_2_NC_TRACE_SILK  [SMT-JUMPER_2_NC_TRACE_SILK]  114.36,60.52 270 top
PWR15  JUMPER-SMT_2_NC_TRACE_SILK  [SMT-JUMPER_2_NC_TRACE_SILK]  10.73,86.42 270 top
PWR16  JUMPER-SMT_2_NC_TRACE_SILK  [SMT-JUMPER_2_NC_TRACE_SILK]  36.64,86.42 270 top
PWR17  JUMPER-SMT_2_NC_TRACE_SILK  [SMT-JUMPER_2_NC_TRACE_SILK]  62.55,86.42 270 top
PWR18  JUMPER-SMT_2_NC_TRACE_SILK  [SMT-JUMPER_2_NC_TRACE_SILK]  88.46,86.42 270 top
PWR19  JUMPER-SMT_2_NC_TRACE_SILK  [SMT-JUMPER_2_NC_TRACE_SILK]  114.36,86.42 270 top
PWR20  JUMPER-SMT_2_NC_TRACE_SILK  [SMT-JUMPER_2_NC_TRACE_SILK]  10.73,112.33 270 top
PWR21  JUMPER-SMT_2_NC_TRACE_SILK  [SMT-JUMPER_2_NC_TRACE_SILK]  36.64,112.33 270 top
PWR22  JUMPER-SMT_2_NC_TRACE_SILK  [SMT-JUMPER_2_NC_TRACE_SILK]  62.55,112.33 270 top
PWR23  JUMPER-SMT_2_NC_TRACE_SILK  [SMT-JUMPER_2_NC_TRACE_SILK]  88.46,112.33 270 top
PWR24  JUMPER-SMT_2_NC_TRACE_SILK  [SMT-JUMPER_2_NC_TRACE_SILK]  114.36,112.33 270 top
PWR25  JUMPER-SMT_2_NC_TRACE_SILK  [SMT-JUMPER_2_NC_TRACE_SILK]  10.73,138.24 270 top
PWR26  JUMPER-SMT_2_NC_TRACE_SILK  [SMT-JUMPER_2_NC_TRACE_SILK]  36.64,138.24 270 top
PWR27  JUMPER-SMT_2_NC_TRACE_SILK  [SMT-JUMPER_2_NC_TRACE_SILK]  62.55,138.24 270 top
PWR28  JUMPER-SMT_2_NC_TRACE_SILK  [SMT-JUMPER_2_NC_TRACE_SILK]  88.46,138.24 270 top
PWR29  JUMPER-SMT_2_NC_TRACE_SILK  [SMT-JUMPER_2_NC_TRACE_SILK]  114.36,138.24 270 top
PWR30  JUMPER-SMT_2_NC_TRACE_SILK  [SMT-JUMPER_2_NC_TRACE_SILK]  10.73,164.15 270 top
PWR31  JUMPER-SMT_2_NC_TRACE_SILK  [SMT-JUMPER_2_NC_TRACE_SILK]  36.64,164.15 270 top
PWR32  JUMPER-SMT_2_NC_TRACE_SILK  [SMT-JUMPER_2_NC_TRACE_SILK]  62.55,164.15 270 top
PWR33  JUMPER-SMT_2_NC_TRACE_SILK  [SMT-JUMPER_2_NC_TRACE_SILK]  88.46,164.15 270 top
PWR34  JUMPER-SMT_2_NC_TRACE_SILK  [SMT-JUMPER_2_NC_TRACE_SILK]  114.36,164.15 270 top
R1  2.2k  [0603]  28.45,13.21 0 top
R2  2.2k  [0603]  28.45,11.3 0 top
R3  10k  [0603]  13.91,14.48 270 top
R4  1k  [0603]  10.67,10.67 0 top
R5  47k  [0603]  25.91,29.72 270 top
R6  2.2k  [0603]  54.36,11.3 0 top
R7  2.2k  [0603]  54.36,13.21 0 top
R8  10k  [0603]  39.81,14.48 270 top
R9  1k  [0603]  36.58,10.67 0 top
R10  10k  [0603]  54.36,9.4 0 top
R11  10k  [0603]  28.45,9.4 0 top
R12  47k  [0603]  51.82,29.72 270 top
R13  2.2k  [0603]  80.26,11.3 0 top
R14  2.2k  [0603]  80.26,13.21 0 top
R15  10k  [0603]  65.72,14.48 270 top
R16  1k  [0603]  62.48,10.67 0 top
R17  10k  [0603]  80.26,9.4 0 top
R18  47k  [0603]  77.72,29.72 270 top
R19  2.2k  [0603]  106.17,11.3 0 top
R20  2.2k  [0603]  106.17,13.21 0 top
R21  10k  [0603]  91.63,14.48 270 top
R22  1k  [0603]  88.39,10.67 0 top
R23  10k  [0603]  106.17,9.4 0 top
R24  47k  [0603]  103.63,29.72 270 top
R25  2.2k  [0603]  132.08,11.3 0 top
R26  2.2k  [0603]  132.08,13.21 0 top
R27  10k  [0603]  117.54,14.48 270 top
R28  1k  [0603]  114.3,10.67 0 top
R29  10k  [0603]  132.08,9.4 0 top
R30  47k  [0603]  129.54,29.72 270 top
R31  2.2k  [0603]  28.45,37.21 0 top
R32  2.2k  [0603]  28.45,39.12 0 top
R33  10k  [0603]  13.91,40.39 270 top
R34  1k  [0603]  10.67,36.58 0 top
R35  10k  [0603]  28.45,35.31 0 top
R36  47k  [0603]  25.91,55.63 270 top
R37  2.2k  [0603]  54.36,37.21 0 top
R38  2.2k  [0603]  54.36,39.12 0 top
R39  10k  [0603]  39.81,40.39 270 top
R40  1k  [0603]  36.58,36.58 0 top
R41  10k  [0603]  54.36,35.31 0 top
R42  47k  [0603]  51.82,55.63 270 top
R43  2.2k  [0603]  80.26,37.21 0 top
R44  2.2k  [0603]  80.26,39.12 0 top
R45  10k  [0603]  65.72,40.39 270 top
R46  1k  [0603]  62.48,36.58 0 top
R47  10k  [0603]  80.26,35.31 0 top
R48  47k  [0603]  77.72,55.63 270 top
R49  2.2k  [0603]  106.17,37.21 0 top
R50  2.2k  [0603]  106.17,39.12 0 top
R51  10k  [0603]  91.63,40.39 270 top
R52  1k  [0603]  88.39,36.58 0 top
R53  10k  [0603]  106.17,35.31 0 top
R54  47k  [0603]  103.63,55.63 270 top
R55  2.2k  [0603]  132.08,37.21 0 top